# EAGLE board SparkFun_Thing_Plus_RP2350-Panel (EAGLE 9.6.2), part 1 of 8
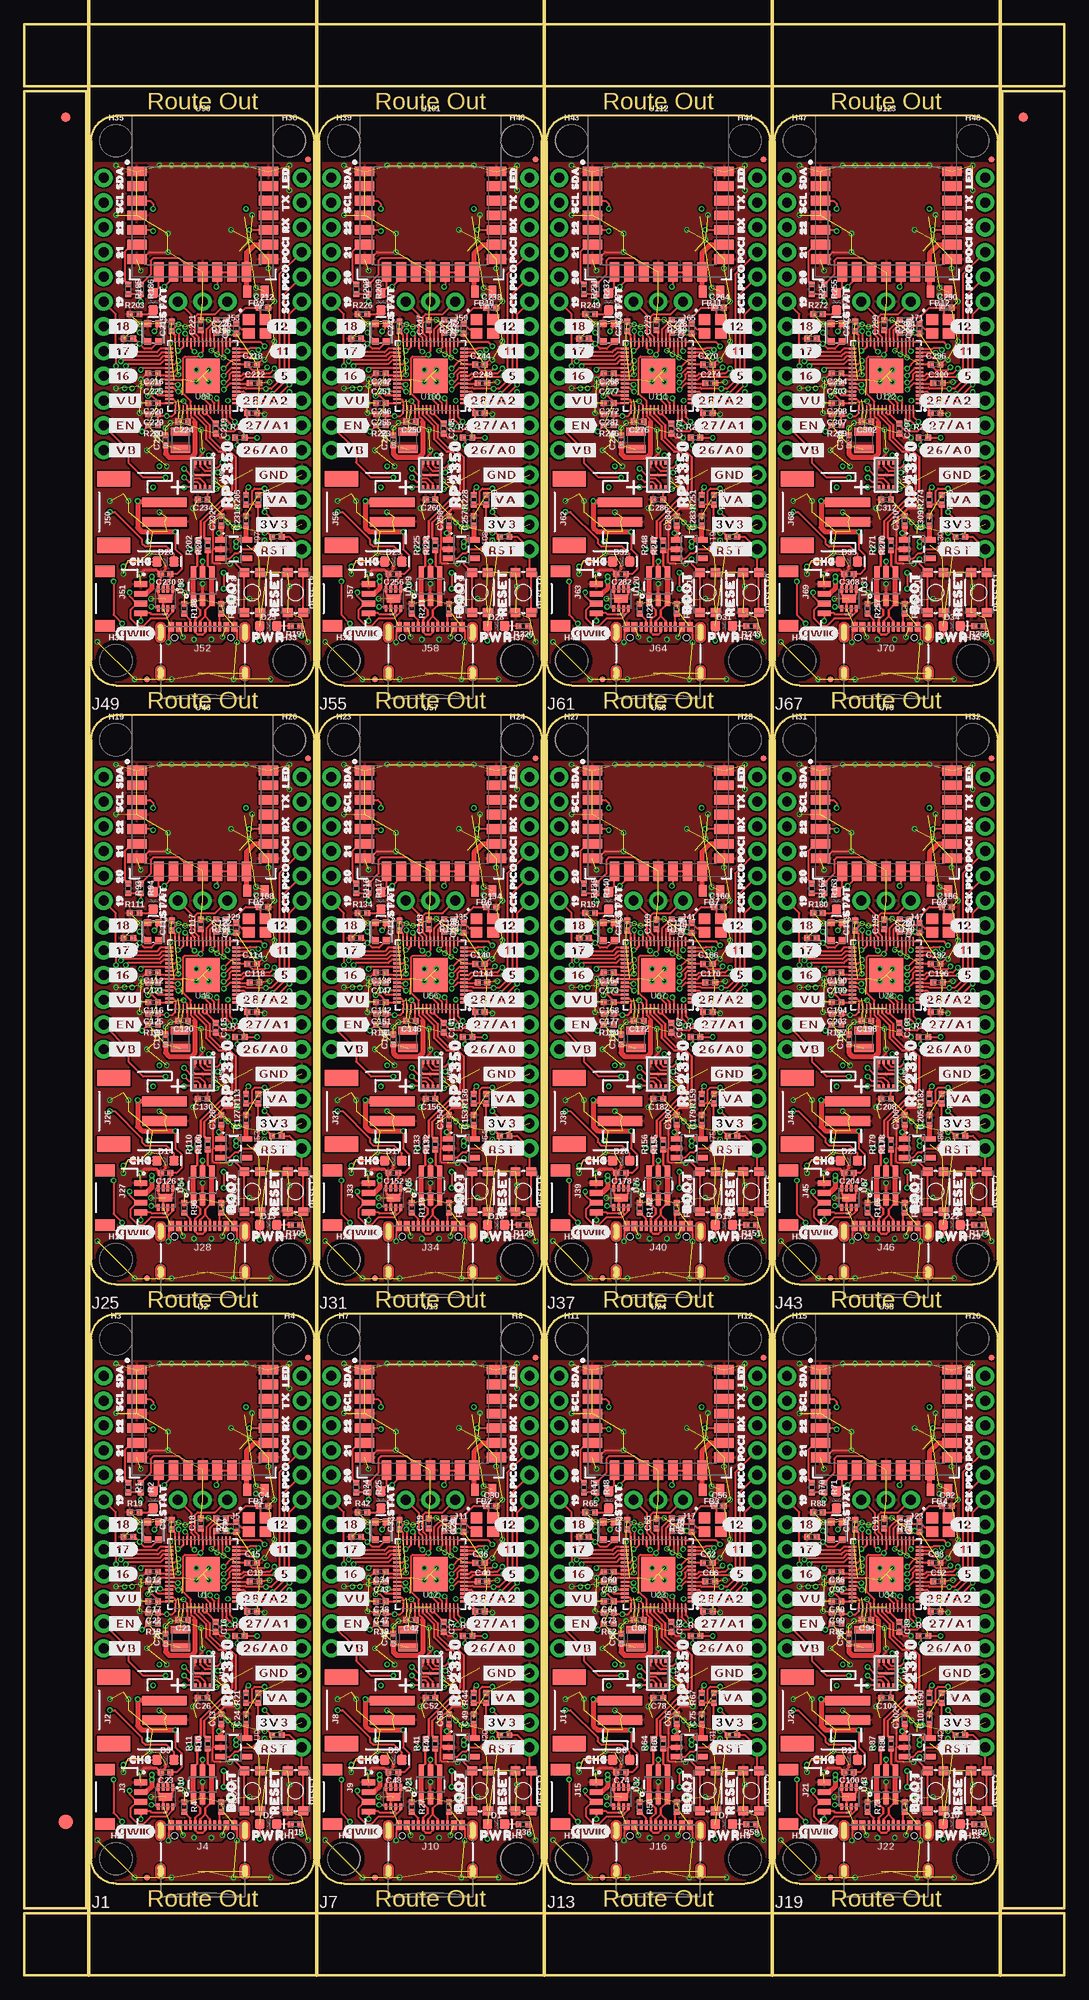
[diagram p0: board, top side]
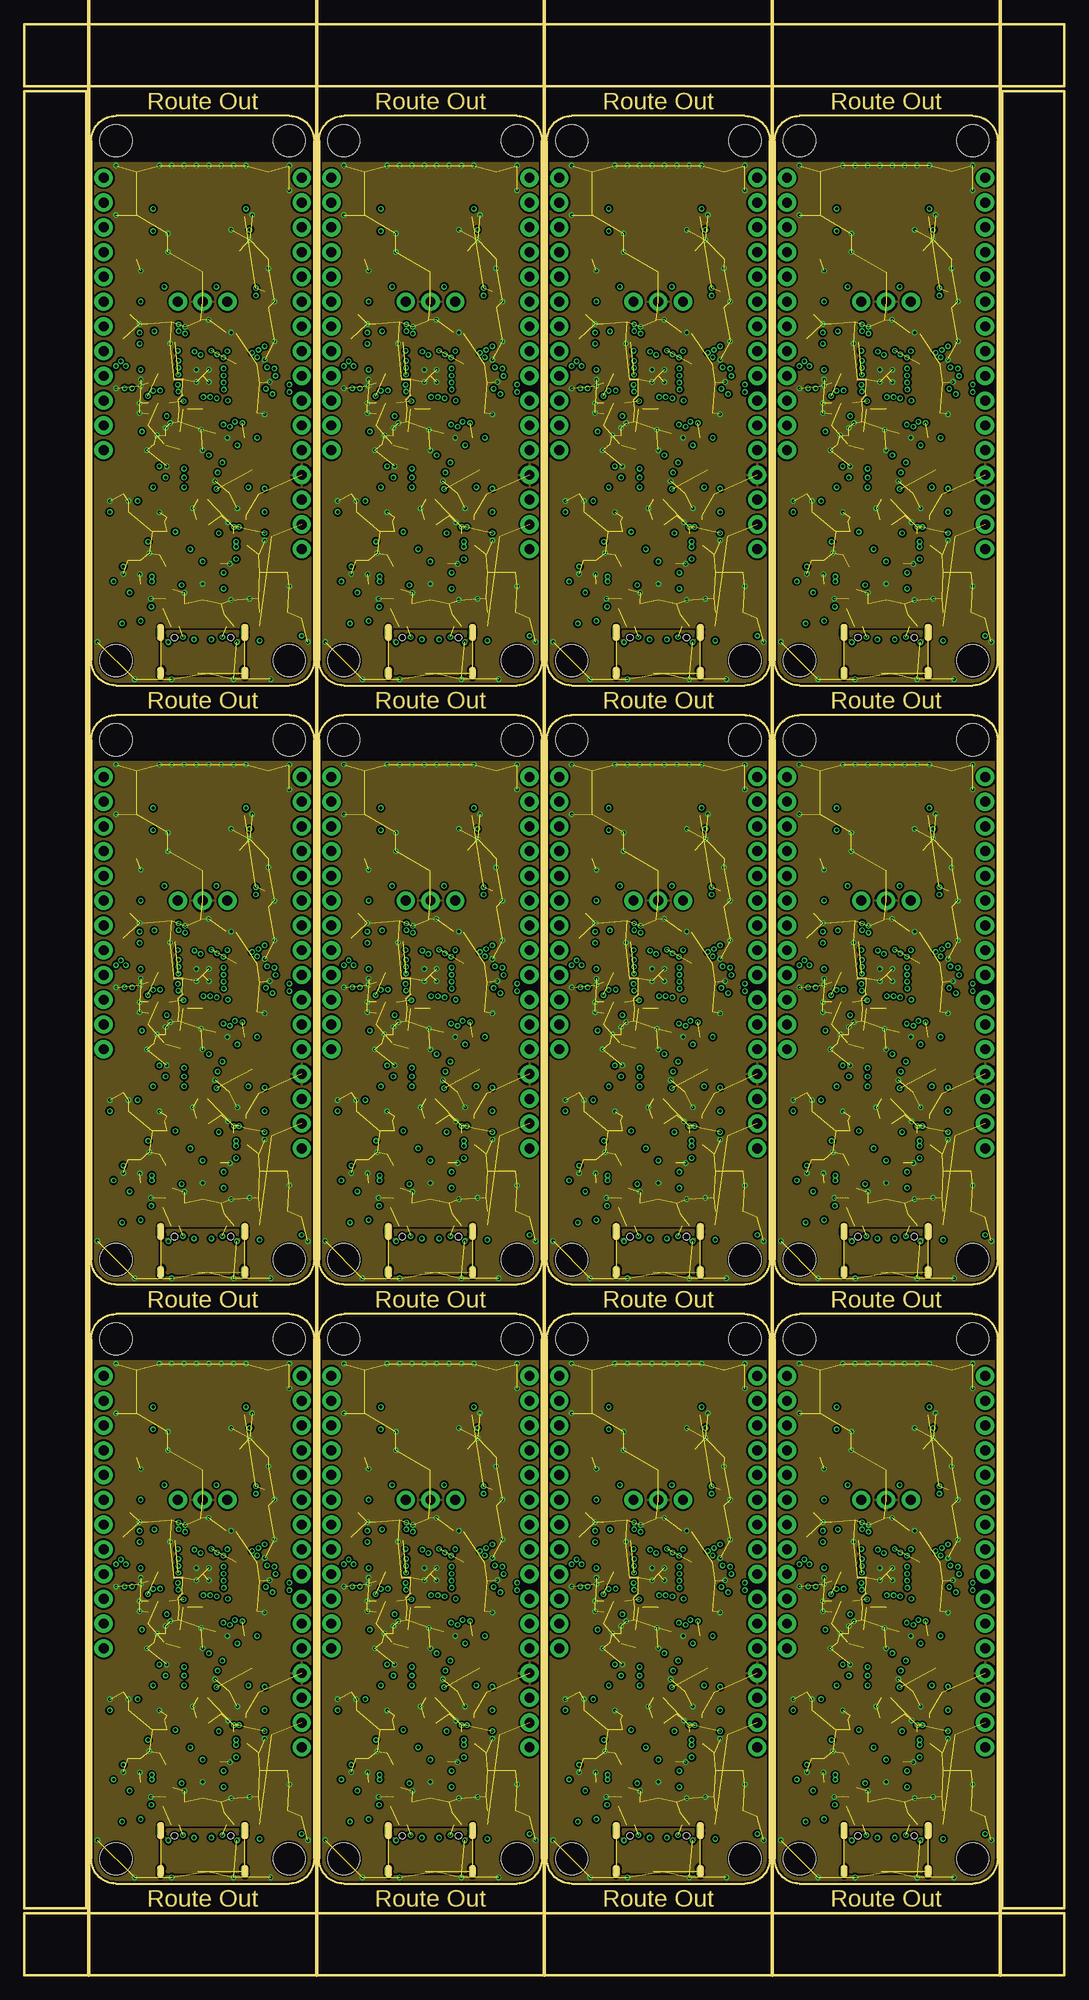
[diagram p1: board, inner layer 2]
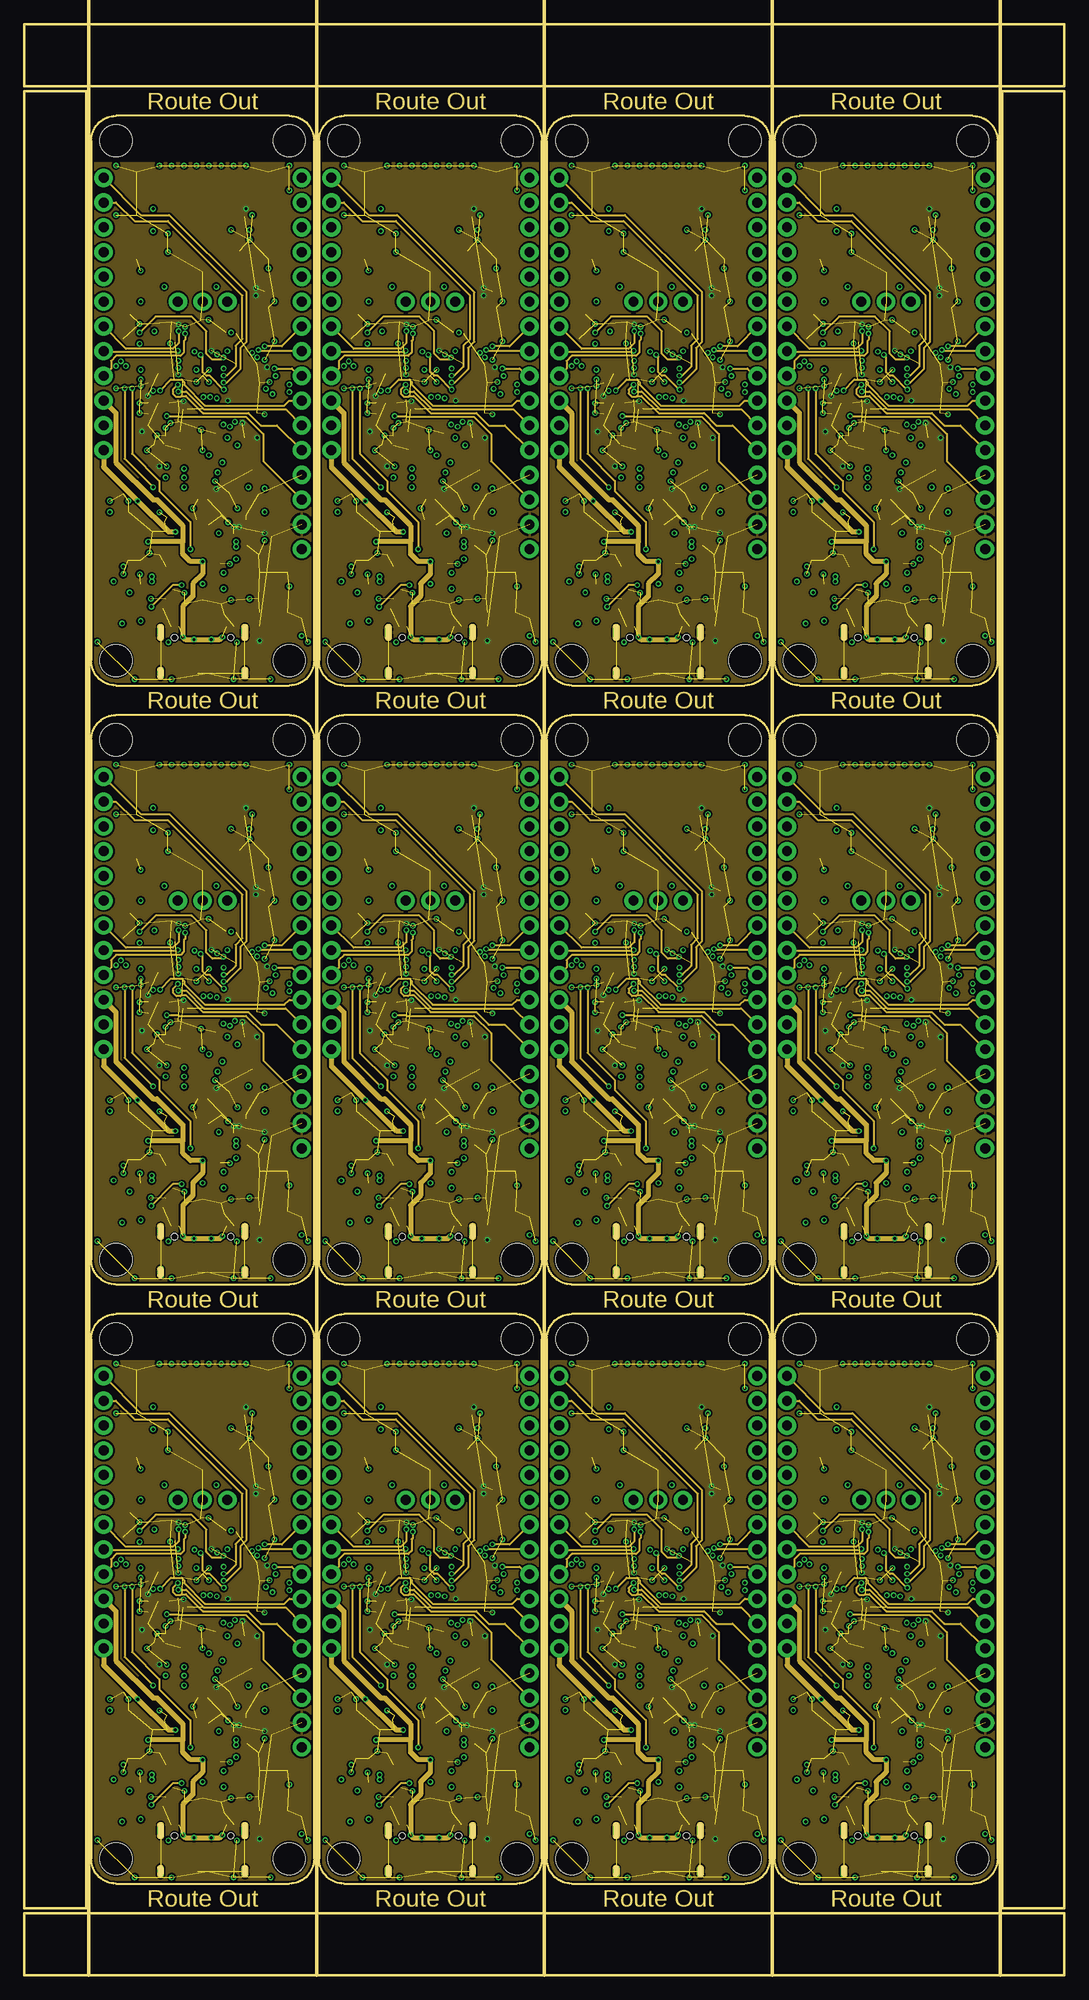
[diagram p2: board, inner layer 15]
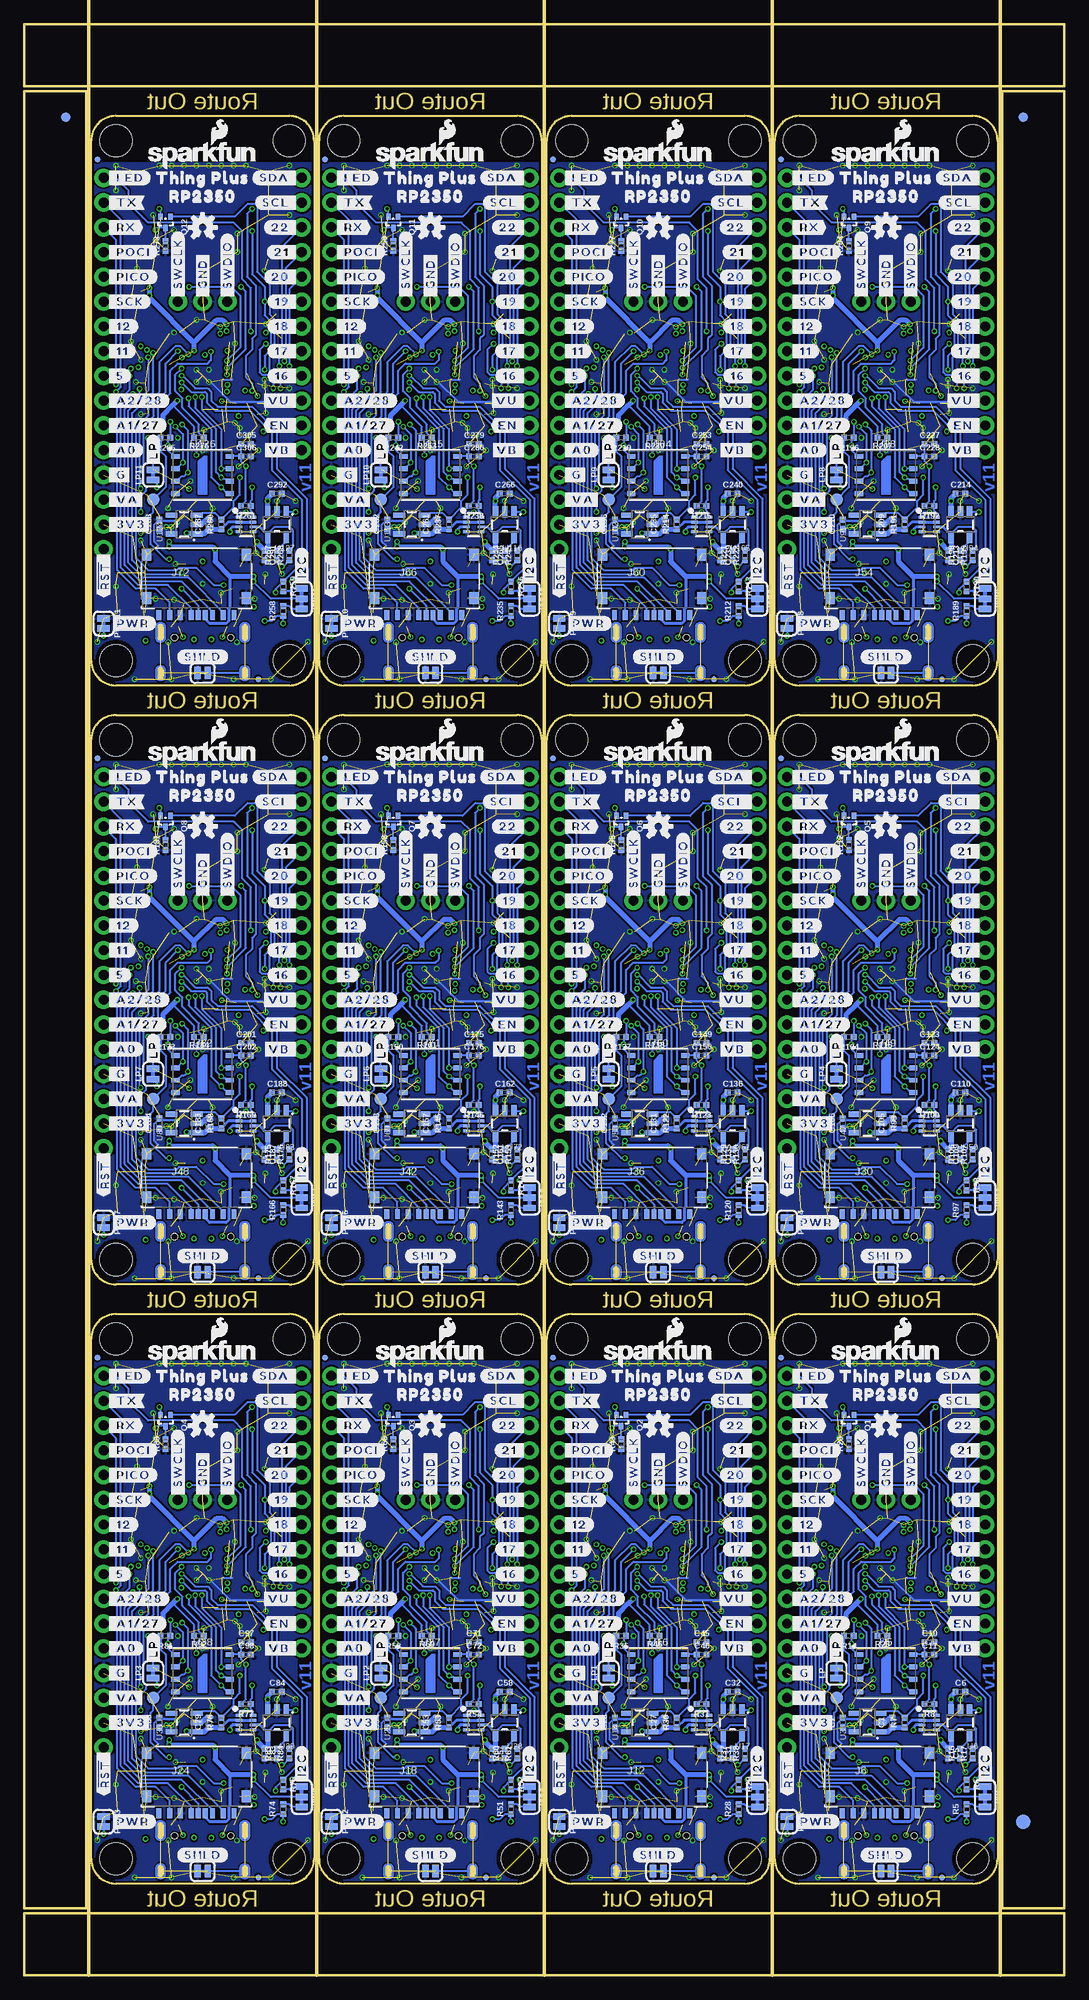
[diagram p3: board, bottom side, seen from below]

Size 106.68 x 200.15 mm. Coordinates in mm from the lower left corner, seen from the top.
Outline: 9.4,9.4 27.18,9.4 arc90 29.72,11.94 29.72,65.28 arc90 27.18,67.82 9.4,67.82 arc90 6.86,65.28 6.86,11.94 arc90 9.4,9.4
Outline: 32.77,9.4 50.55,9.4 arc90 53.09,11.94 53.09,65.28 arc90 50.55,67.82 32.77,67.82 arc90 30.23,65.28 30.23,11.94 arc90 32.77,9.4
Outline: 56.13,9.4 73.91,9.4 arc90 76.45,11.94 76.45,65.28 arc90 73.91,67.82 56.13,67.82 arc90 53.59,65.28 53.59,11.94 arc90 56.13,9.4
Outline: 79.5,9.4 97.28,9.4 arc90 99.82,11.94 99.82,65.28 arc90 97.28,67.82 79.5,67.82 arc90 76.96,65.28 76.96,11.94 arc90 79.5,9.4
Outline: 9.4,70.87 27.18,70.87 arc90 29.72,73.41 29.72,126.75 arc90 27.18,129.29 9.4,129.29 arc90 6.86,126.75 6.86,73.41 arc90 9.4,70.87
Outline: 32.77,70.87 50.55,70.87 arc90 53.09,73.41 53.09,126.75 arc90 50.55,129.29 32.77,129.29 arc90 30.23,126.75 30.23,73.41 arc90 32.77,70.87
Outline: 56.13,70.87 73.91,70.87 arc90 76.45,73.41 76.45,126.75 arc90 73.91,129.29 56.13,129.29 arc90 53.59,126.75 53.59,73.41 arc90 56.13,70.87
Outline: 79.5,70.87 97.28,70.87 arc90 99.82,73.41 99.82,126.75 arc90 97.28,129.29 79.5,129.29 arc90 76.96,126.75 76.96,73.41 arc90 79.5,70.87
Outline: 9.4,132.33 27.18,132.33 arc90 29.72,134.87 29.72,188.21 arc90 27.18,190.75 9.4,190.75 arc90 6.86,188.21 6.86,134.87 arc90 9.4,132.33
Outline: 32.77,132.33 50.55,132.33 arc90 53.09,134.87 53.09,188.21 arc90 50.55,190.75 32.77,190.75 arc90 30.23,188.21 30.23,134.87 arc90 32.77,132.33
Outline: 56.13,132.33 73.91,132.33 arc90 76.45,134.87 76.45,188.21 arc90 73.91,190.75 56.13,190.75 arc90 53.59,188.21 53.59,134.87 arc90 56.13,132.33
Outline: 79.5,132.33 97.28,132.33 arc90 99.82,134.87 99.82,188.21 arc90 97.28,190.75 79.5,190.75 arc90 76.96,188.21 76.96,134.87 arc90 79.5,132.33
Outline: 0,6.35 106.68,6.35 106.68,0 0,0 0,6.35
Outline: 100.33,193.29 106.68,193.29 106.68,6.86 100.33,6.86 100.33,193.29
Outline: 0,200.15 106.68,200.15 106.68,193.8 0,193.8 0,200.15
Outline: 0,193.29 6.35,193.29 6.35,6.86 0,6.86 0,193.29
Copper layers (1*2*15*16): Top 0.035559375mm / dielectric 0.47751875mm / layer 2 0.035559375mm / dielectric 0.47751875mm / layer 15 0.035559375mm / dielectric 0.47751875mm / Bottom 0.035559375mm
Design rules "SparkFun_Thing_Plus_RP2350": minimum track width 5mil, minimum drill 0.2mm, track to track 5mil, track to pad 5mil, pad to pad 5mil, via to via 5mil, smd to smd 5mil, copper to edge 7mil, drill to drill 7mil, minimum pad ring 5mil, minimum via ring 5mil, stop-mask expansion 2.5mil, vias tented up to drill 25mil, thermal gap 10mil
Net classes: 1 USB: width 0.233 mm, clearance 0.127 mm to class 0, clearance 0.127 mm
Milling: 5 lines

## Footprints (pad centres in the part's own frame; a part is rotated, then mirrored left to right if it is on the bottom)
TACTILE_SWITCH_SMD_4.6X2.8MM = smd 0.9 x 1: 1 -2.05,-0.8; 2 2.05,-0.8; 3 2.05,0.8; 4 -2.05,0.8
0402-TIGHT = smd 0.6 x 0.6: 1 -0.5,0; 2 0.5,0
LED-0603 = smd 1 x 1: A -0.877,0; C 0.877,0
FIDUCIAL-1X2 = smd 1 x 1: 1 0,0
FIDUCIAL-1.5X3 = smd 1.5 x 1.5: 1 0,0
0805 = smd 0.8 x 1.2: 1 -0.9,0; 2 0.9,0
FIDUCIAL-MICRO = smd 0.635 x 0.635: 1 0,0
STAND-OFF = hole 3.302: 0,0
SMT-JUMPER_3_2-NC_TRACE_SILK = smd 0.66 x 1.27: 1 -1.041,0; 2 0,0; 3 1.041,0
THING_PLUS = drill 1.016 pad 1.88: 1 1.27,52.07; 2 1.27,49.53; 3 1.27,46.99; 4 1.27,44.45; 5 1.27,41.91; 6 1.27,39.37; 7 1.27,36.83; 8 1.27,34.29; 9 1.27,31.75; 10 1.27,29.21; 11 1.27,26.67; 12 1.27,24.13; 13 21.59,52.07; 14 21.59,49.53; 15 21.59,46.99; 16 21.59,44.45; 17 21.59,41.91; 18 21.59,39.37; 19 21.59,36.83; 20 21.59,34.29; 21 21.59,31.75; 22 21.59,29.21; 23 21.59,26.67; 24 21.59,24.13; 25 21.59,21.59; 26 21.59,19.05; 27 21.59,16.51; 28 21.59,13.97
JST-2-SMD = smd 1 x 4.6: 1 -1,-3.7; 2 1,-3.7 | smd 1.6 x 3.4: NC1 -3.4,1.5; NC2 3.4,1.5
JST04_1MM_RA = smd 0.6 x 1.35: 1 -1.5,0; 2 -0.5,0; 3 0.5,0; 4 1.5,0 | smd 1.2 x 2: NC1 2.8,-3.675; NC2 -2.8,-3.675
USB-C-16P_4LAYER-PADS = smd 0.3 x 1: A5 -1.25,-0.34; A6 -0.25,-0.34; A7 0.25,-0.34; A8 1.25,-0.34; B5 1.75,-0.34; B6 0.75,-0.34; B7 -0.75,-0.34; B8 -1.75,-0.34 | smd 0.6 x 1: GND -3.225,-0.34; GND2 3.225,-0.34; VBUS1 -2.45,-0.34; VBUS2 2.45,-0.34 | drill 0.4 pad 0.6 long: SHLD1 -4.318,-0.915; SHLD2 4.318,-0.915; SHLD3 -4.318,-5.095; SHLD4 4.318,-5.095 | hole 0.65: -2.89,-1.445; 2.89,-1.445
1X03_NO_SILK = drill 1.016 pad 1.88: 1 0,0; 2 2.54,0; 3 5.08,0
MICROSD_ATOM = smd 0.5 x 1: 1 3.85,-3.975; 2 2.75,-3.975; 3 1.65,-3.975; 4 0.9,-3.975; 5 -0.55,-3.975; 6 -1.65,-3.975; 7 -2.75,-3.975; 8 -3.85,-3.975; 9 0.2,-3.975 | smd 0.95 x 1.2: SHIELD1 5.1,-2.225; SHIELD2 5.1,2.225; SHIELD3 -5.1,2.225; SHIELD4 -5.1,-2.225
1008(2520) = smd 0.8 x 2: 1 -0.9,0; 2 0.9,0
SMT-JUMPER_2_NC_TRACE_SILK = smd 0.66 x 1.27: 1 -0.521,0; 2 0.521,0
SOT-416FL = smd 0.46 x 0.65: 1 -0.5,-1.1; 2 0.5,-1.1; 3 0,0.05
PAD.03X.05 = smd 1.27 x 1.27: 1 0,0
RP2350A = smd 0.875 x 0.2: 1 -3.437,2.8; 2 -3.437,2.4; 3 -3.437,2; 4 -3.437,1.6; 5 -3.437,1.2; 6 -3.437,0.8; 7 -3.437,0.4; 8 -3.437,0; 9 -3.437,-0.4; 10 -3.437,-0.8; 11 -3.437,-1.2; 12 -3.437,-1.6; 13 -3.437,-2; 14 -3.437,-2.4; 15 -3.437,-2.8; 31 3.437,-2.8; 32 3.437,-2.4; 33 3.437,-2; 34 3.437,-1.6; 35 3.437,-1.2; 36 3.437,-0.8; 37 3.437,-0.4; 38 3.437,0; 39 3.437,0.4; 40 3.437,0.8; 41 3.437,1.2; 42 3.437,1.6; 43 3.437,2; 44 3.437,2.4; 45 3.437,2.8 | smd 0.2 x 0.875: 16 -2.8,-3.437; 17 -2.4,-3.437; 18 -2,-3.437; 19 -1.6,-3.437; 20 -1.2,-3.437; 21 -0.8,-3.437; 22 -0.4,-3.437; 23 0,-3.437; 24 0.4,-3.437; 25 0.8,-3.437; 26 1.2,-3.437; 27 1.6,-3.437; 28 2,-3.437; 29 2.4,-3.437; 30 2.8,-3.437; 46 2.8,3.437; 47 2.4,3.437; 48 2,3.437; 49 1.6,3.437; 50 1.2,3.437; 51 0.8,3.437; 52 0.4,3.437; 53 0,3.437; 54 -0.4,3.437; 55 -0.8,3.437; 56 -1.2,3.437; 57 -1.6,3.437; 58 -2,3.437; 59 -2.4,3.437; 60 -2.8,3.437 | smd 3.5 x 3.5: EPAD 0,0
RM2 = smd 2 x 1: A1 -6.75,2.55; A2 -6.75,1.05; A3 -6.75,-0.45; A4 -6.75,-1.95; A5 -6.75,-3.45; A6 -6.75,-4.95; A7 -6.75,-6.45; C1 6.75,-6.45; C2 6.75,-4.95; C3 6.75,-3.45; C4 6.75,-1.95; C5 6.75,-0.45; C6 6.75,1.05; C7 6.75,2.55 | smd 1 x 2: B1 -4.5,-7.75; B2 -3,-7.75; B3 -1.5,-7.75; B4 0,-7.75; B5 1.5,-7.75; B6 3,-7.75; B7 4.5,-7.75
SOT23-5 = smd 0.55 x 1.2: 1 -0.95,-1.3; 2 0,-1.3; 3 0.95,-1.3; 4 0.95,1.3; 5 -0.95,1.3
SOT8 = smd 0.67 x 0.3: 1 -0.74,0.75; 2 -0.74,0.25; 3 -0.74,-0.25; 4 -0.74,-0.75; 5 0.74,-0.75; 6 0.74,-0.25; 7 0.74,0.25; 8 0.74,0.75
WSON-8-6X5-SKINNY_CENTERPAD = smd 0.85 x 0.5: 1 -2.775,1.905; 2 -2.775,0.635; 3 -2.775,-0.635; 4 -2.775,-1.905; 5 2.775,-1.905; 6 2.775,-0.635; 7 2.775,0.635; 8 2.775,1.905
WS2812-2020 = smd 0.7 x 0.7: DI -0.915,0.55; DO 0.915,-0.55; GND 0.915,0.55; VCC -0.915,-0.55
DFN-8 = smd 0.3 x 0.7: 1 -0.75,-0.99; 2 -0.25,-0.99; 3 0.25,-0.99; 4 0.75,-0.99; 5 0.75,0.99; 6 0.25,0.99; 7 -0.25,0.99; 8 -0.75,0.99 | smd 1.38 x 0.8: 9 0,0
SOT-23-6 = smd 0.55 x 1.35: 1 -0.95,-1.375; 2 0,-1.375; 3 0.95,-1.375; 4 0.95,1.375; 5 0,1.375; 6 -0.95,1.375
APS6404L-3SQR-ZR = smd 0.4 x 0.25: 1 -1.25,0.75; 2 -1.25,0.25; 3 -1.25,-0.25; 4 -1.25,-0.75; 5 1.25,-0.75; 6 1.25,-0.25; 7 1.25,0.25; 8 1.25,0.75 | smd 0.2 x 1.6: 9 0,0
CRYSTAL-SMD-2X2.5MM = smd 1.2 x 1.1: P1 0.846,0.69; P2 -0.854,0.69; P3 -0.854,-0.71; P4 0.846,-0.71

## Placement (x,y rotation side)
BOOT  MOMENTARY-SWITCH-SPST-SMD-4.6X2.8MM  [TACTILE_SWITCH_SMD_4.6X2.8MM]  23.37,18.92 90 top
BOOT1  MOMENTARY-SWITCH-SPST-SMD-4.6X2.8MM  [TACTILE_SWITCH_SMD_4.6X2.8MM]  46.74,18.92 90 top
BOOT2  MOMENTARY-SWITCH-SPST-SMD-4.6X2.8MM  [TACTILE_SWITCH_SMD_4.6X2.8MM]  70.1,18.92 90 top
BOOT3  MOMENTARY-SWITCH-SPST-SMD-4.6X2.8MM  [TACTILE_SWITCH_SMD_4.6X2.8MM]  93.47,18.92 90 top
BOOT4  MOMENTARY-SWITCH-SPST-SMD-4.6X2.8MM  [TACTILE_SWITCH_SMD_4.6X2.8MM]  23.37,80.39 90 top
BOOT5  MOMENTARY-SWITCH-SPST-SMD-4.6X2.8MM  [TACTILE_SWITCH_SMD_4.6X2.8MM]  46.74,80.39 90 top
BOOT6  MOMENTARY-SWITCH-SPST-SMD-4.6X2.8MM  [TACTILE_SWITCH_SMD_4.6X2.8MM]  70.1,80.39 90 top
BOOT7  MOMENTARY-SWITCH-SPST-SMD-4.6X2.8MM  [TACTILE_SWITCH_SMD_4.6X2.8MM]  93.47,80.39 90 top
BOOT8  MOMENTARY-SWITCH-SPST-SMD-4.6X2.8MM  [TACTILE_SWITCH_SMD_4.6X2.8MM]  23.37,141.86 90 top
BOOT9  MOMENTARY-SWITCH-SPST-SMD-4.6X2.8MM  [TACTILE_SWITCH_SMD_4.6X2.8MM]  46.74,141.86 90 top
BOOT10  MOMENTARY-SWITCH-SPST-SMD-4.6X2.8MM  [TACTILE_SWITCH_SMD_4.6X2.8MM]  70.1,141.86 90 top
BOOT11  MOMENTARY-SWITCH-SPST-SMD-4.6X2.8MM  [TACTILE_SWITCH_SMD_4.6X2.8MM]  93.47,141.86 90 top
C1  2.2uF  [0402-TIGHT]  17.65,25.92 90 bottom
C2  2.2uF  [0402-TIGHT]  22.73,25.92 90 bottom
C3  15pF  [0402-TIGHT]  21.72,45.98 90 top
C4  15pF  [0402-TIGHT]  24.52,48.13 0 top
C5  2.2uF  [0402-TIGHT]  11.94,22.73 270 bottom
C6  2.2uF  [0402-TIGHT]  10.67,29.08 0 bottom
C7  0.1uF  [0402-TIGHT]  13.21,40.39 180 top
C8  0.1uF  [0402-TIGHT]  20.19,45.59 0 top
C9  0.1uF  [0402-TIGHT]  15.11,46.23 90 top
C10  2.2uF  [0402-TIGHT]  13.84,34.16 0 bottom
C11  0.1uF  [0402-TIGHT]  13.84,32.89 0 bottom
C12  0.1uF  [0402-TIGHT]  13.21,41.4 180 top
C13  2.2uF  [0402-TIGHT]  20.19,26.29 90 top
C14  0.1uF  [0402-TIGHT]  23.37,37.34 0 top
C15  0.1uF  [0402-TIGHT]  23.37,42.29 0 top
C16  0.1uF  [0402-TIGHT]  19.63,35.74 270 top
C17  0.1uF  [0402-TIGHT]  13.21,38.35 180 top
C18  0.1uF  [0402-TIGHT]  18.1,46.36 90 top
C19  0.1uF  [0402-TIGHT]  23.62,40.39 0 top
C20  10uF  [0402-TIGHT]  14.48,34.54 90 top
C21  10uF  [0402-TIGHT]  16.28,36.45 180 top
C22  2.2uF  [0402-TIGHT]  13.21,37.21 180 top
C23  0.1uF  [0402-TIGHT]  14.48,20.83 180 top
C24  10uF  [0402-TIGHT]  22.73,26.29 90 top
C25  0.1uF  [0402-TIGHT]  10.67,44.96 180 top
C26  0.1uF  [0402-TIGHT]  18.29,28.45 180 top
C27  2.2uF  [0402-TIGHT]  41.02,25.92 90 bottom
C28  2.2uF  [0402-TIGHT]  46.1,25.92 90 bottom
C29  15pF  [0402-TIGHT]  45.08,45.98 90 top
C30  15pF  [0402-TIGHT]  47.89,48.13 0 top
C31  2.2uF  [0402-TIGHT]  35.31,22.73 270 bottom
C32  2.2uF  [0402-TIGHT]  34.04,29.08 0 bottom
C33  0.1uF  [0402-TIGHT]  38.48,46.23 90 top
C34  0.1uF  [0402-TIGHT]  36.58,41.4 180 top
C35  0.1uF  [0402-TIGHT]  46.74,37.34 0 top
C36  0.1uF  [0402-TIGHT]  46.74,42.29 0 top
C37  0.1uF  [0402-TIGHT]  43,35.74 270 top
C38  0.1uF  [0402-TIGHT]  36.58,38.35 180 top
C39  0.1uF  [0402-TIGHT]  41.47,46.36 90 top
C40  0.1uF  [0402-TIGHT]  46.99,40.39 0 top
C41  10uF  [0402-TIGHT]  37.85,34.54 90 top
C42  10uF  [0402-TIGHT]  39.65,36.45 180 top
C43  0.1uF  [0402-TIGHT]  36.58,40.39 180 top
C44  0.1uF  [0402-TIGHT]  43.56,45.59 0 top
C45  2.2uF  [0402-TIGHT]  37.21,34.16 0 bottom
C46  0.1uF  [0402-TIGHT]  37.21,32.89 0 bottom
C47  2.2uF  [0402-TIGHT]  36.58,37.21 180 top
C48  0.1uF  [0402-TIGHT]  37.85,20.83 180 top
C49  10uF  [0402-TIGHT]  46.1,26.29 90 top
C50  2.2uF  [0402-TIGHT]  43.56,26.29 90 top
C51  0.1uF  [0402-TIGHT]  34.04,44.96 180 top
C52  0.1uF  [0402-TIGHT]  41.66,28.45 180 top
C53  2.2uF  [0402-TIGHT]  64.39,25.92 90 bottom
C54  2.2uF  [0402-TIGHT]  69.47,25.92 90 bottom
C55  15pF  [0402-TIGHT]  68.45,45.98 90 top
C56  15pF  [0402-TIGHT]  71.26,48.13 0 top
C57  2.2uF  [0402-TIGHT]  58.67,22.73 270 bottom
C58  2.2uF  [0402-TIGHT]  57.4,29.08 0 bottom
C59  0.1uF  [0402-TIGHT]  61.85,46.23 90 top
C60  0.1uF  [0402-TIGHT]  59.94,41.4 180 top
C61  0.1uF  [0402-TIGHT]  70.1,37.34 0 top
C62  0.1uF  [0402-TIGHT]  70.1,42.29 0 top
C63  0.1uF  [0402-TIGHT]  66.37,35.74 270 top
C64  0.1uF  [0402-TIGHT]  59.94,38.35 180 top
C65  0.1uF  [0402-TIGHT]  64.83,46.36 90 top
C66  0.1uF  [0402-TIGHT]  70.36,40.39 0 top
C67  10uF  [0402-TIGHT]  61.21,34.54 90 top
C68  10uF  [0402-TIGHT]  63.02,36.45 180 top
C69  0.1uF  [0402-TIGHT]  59.94,40.39 180 top
C70  0.1uF  [0402-TIGHT]  66.93,45.59 0 top
C71  2.2uF  [0402-TIGHT]  60.58,34.16 0 bottom
C72  0.1uF  [0402-TIGHT]  60.58,32.89 0 bottom
C73  2.2uF  [0402-TIGHT]  59.94,37.21 180 top
C74  0.1uF  [0402-TIGHT]  61.21,20.83 180 top
C75  10uF  [0402-TIGHT]  69.47,26.29 90 top
C76  2.2uF  [0402-TIGHT]  66.93,26.29 90 top
C77  0.1uF  [0402-TIGHT]  57.4,44.96 180 top
C78  0.1uF  [0402-TIGHT]  65.02,28.45 180 top
C79  2.2uF  [0402-TIGHT]  87.76,25.92 90 bottom
C80  2.2uF  [0402-TIGHT]  92.84,25.92 90 bottom
C81  15pF  [0402-TIGHT]  91.82,45.98 90 top
C82  15pF  [0402-TIGHT]  94.62,48.13 0 top
C83  2.2uF  [0402-TIGHT]  82.04,22.73 270 bottom
C84  2.2uF  [0402-TIGHT]  80.77,29.08 0 bottom
C85  0.1uF  [0402-TIGHT]  85.22,46.23 90 top
C86  0.1uF  [0402-TIGHT]  83.31,41.4 180 top
C87  0.1uF  [0402-TIGHT]  93.47,37.34 0 top
C88  0.1uF  [0402-TIGHT]  93.47,42.29 0 top
C89  0.1uF  [0402-TIGHT]  89.74,35.74 270 top
C90  0.1uF  [0402-TIGHT]  83.31,38.35 180 top
C91  0.1uF  [0402-TIGHT]  88.2,46.36 90 top
C92  0.1uF  [0402-TIGHT]  93.73,40.39 0 top
C93  10uF  [0402-TIGHT]  84.58,34.54 90 top
C94  10uF  [0402-TIGHT]  86.39,36.45 180 top
C95  0.1uF  [0402-TIGHT]  83.31,40.39 180 top
C96  0.1uF  [0402-TIGHT]  90.3,45.59 0 top
C97  2.2uF  [0402-TIGHT]  83.95,34.16 0 bottom
C98  0.1uF  [0402-TIGHT]  83.95,32.89 0 bottom
C99  2.2uF  [0402-TIGHT]  83.31,37.21 180 top
C100  0.1uF  [0402-TIGHT]  84.58,20.83 180 top
C101  10uF  [0402-TIGHT]  92.84,26.29 90 top
C102  2.2uF  [0402-TIGHT]  90.3,26.29 90 top
C103  0.1uF  [0402-TIGHT]  80.77,44.96 180 top
C104  0.1uF  [0402-TIGHT]  88.39,28.45 180 top
C105  2.2uF  [0402-TIGHT]  17.65,87.38 90 bottom
C106  2.2uF  [0402-TIGHT]  22.73,87.38 90 bottom
C107  15pF  [0402-TIGHT]  21.72,107.45 90 top
C108  15pF  [0402-TIGHT]  24.52,109.6 0 top
C109  2.2uF  [0402-TIGHT]  11.94,84.2 270 bottom
C110  2.2uF  [0402-TIGHT]  10.67,90.55 0 bottom
C111  0.1uF  [0402-TIGHT]  15.11,107.7 90 top
C112  0.1uF  [0402-TIGHT]  13.21,102.87 180 top
C113  0.1uF  [0402-TIGHT]  23.37,98.81 0 top
C114  0.1uF  [0402-TIGHT]  23.37,103.76 0 top
C115  0.1uF  [0402-TIGHT]  19.63,97.21 270 top
C116  0.1uF  [0402-TIGHT]  13.21,99.82 180 top
C117  0.1uF  [0402-TIGHT]  18.1,107.82 90 top
C118  0.1uF  [0402-TIGHT]  23.62,101.85 0 top
C119  10uF  [0402-TIGHT]  14.48,96.01 90 top
C120  10uF  [0402-TIGHT]  16.28,97.92 180 top
C121  0.1uF  [0402-TIGHT]  13.21,101.85 180 top
C122  0.1uF  [0402-TIGHT]  20.19,107.06 0 top
C123  2.2uF  [0402-TIGHT]  13.84,95.63 0 bottom
C124  0.1uF  [0402-TIGHT]  13.84,94.36 0 bottom
C125  2.2uF  [0402-TIGHT]  13.21,98.68 180 top
C126  0.1uF  [0402-TIGHT]  14.48,82.3 180 top
C127  10uF  [0402-TIGHT]  22.73,87.76 90 top
C128  2.2uF  [0402-TIGHT]  20.19,87.76 90 top
C129  0.1uF  [0402-TIGHT]  10.67,106.43 180 top
C130  0.1uF  [0402-TIGHT]  18.29,89.92 180 top
C131  2.2uF  [0402-TIGHT]  41.02,87.38 90 bottom
C132  2.2uF  [0402-TIGHT]  46.1,87.38 90 bottom
C133  15pF  [0402-TIGHT]  45.08,107.45 90 top
C134  15pF  [0402-TIGHT]  47.89,109.6 0 top
C135  2.2uF  [0402-TIGHT]  35.31,84.2 270 bottom
C136  2.2uF  [0402-TIGHT]  34.04,90.55 0 bottom
C137  0.1uF  [0402-TIGHT]  38.48,107.7 90 top
C138  0.1uF  [0402-TIGHT]  36.58,102.87 180 top
C139  0.1uF  [0402-TIGHT]  46.74,98.81 0 top
C140  0.1uF  [0402-TIGHT]  46.74,103.76 0 top
C141  0.1uF  [0402-TIGHT]  43,97.21 270 top
C142  0.1uF  [0402-TIGHT]  36.58,99.82 180 top
C143  0.1uF  [0402-TIGHT]  41.47,107.82 90 top
C144  0.1uF  [0402-TIGHT]  46.99,101.85 0 top
C145  10uF  [0402-TIGHT]  37.85,96.01 90 top
C146  10uF  [0402-TIGHT]  39.65,97.92 180 top
C147  0.1uF  [0402-TIGHT]  36.58,101.85 180 top
C148  0.1uF  [0402-TIGHT]  43.56,107.06 0 top
C149  2.2uF  [0402-TIGHT]  37.21,95.63 0 bottom
C150  0.1uF  [0402-TIGHT]  37.21,94.36 0 bottom
C151  2.2uF  [0402-TIGHT]  36.58,98.68 180 top
C152  0.1uF  [0402-TIGHT]  37.85,82.3 180 top
C153  10uF  [0402-TIGHT]  46.1,87.76 90 top
C154  2.2uF  [0402-TIGHT]  43.56,87.76 90 top
C155  0.1uF  [0402-TIGHT]  34.04,106.43 180 top
C156  0.1uF  [0402-TIGHT]  41.66,89.92 180 top
C157  2.2uF  [0402-TIGHT]  64.39,87.38 90 bottom
C158  2.2uF  [0402-TIGHT]  69.47,87.38 90 bottom
C159  15pF  [0402-TIGHT]  68.45,107.45 90 top
C160  15pF  [0402-TIGHT]  71.26,109.6 0 top
C161  2.2uF  [0402-TIGHT]  58.67,84.2 270 bottom
C162  2.2uF  [0402-TIGHT]  57.4,90.55 0 bottom
C163  0.1uF  [0402-TIGHT]  61.85,107.7 90 top
C164  0.1uF  [0402-TIGHT]  59.94,102.87 180 top
C165  0.1uF  [0402-TIGHT]  70.1,98.81 0 top
C166  0.1uF  [0402-TIGHT]  70.1,103.76 0 top
C167  0.1uF  [0402-TIGHT]  66.37,97.21 270 top
C168  0.1uF  [0402-TIGHT]  59.94,99.82 180 top
C169  0.1uF  [0402-TIGHT]  64.83,107.82 90 top
C170  0.1uF  [0402-TIGHT]  70.36,101.85 0 top
C171  10uF  [0402-TIGHT]  61.21,96.01 90 top
C172  10uF  [0402-TIGHT]  63.02,97.92 180 top
C173  0.1uF  [0402-TIGHT]  59.94,101.85 180 top
C174  0.1uF  [0402-TIGHT]  66.93,107.06 0 top
C175  2.2uF  [0402-TIGHT]  60.58,95.63 0 bottom
C176  0.1uF  [0402-TIGHT]  60.58,94.36 0 bottom
C177  2.2uF  [0402-TIGHT]  59.94,98.68 180 top
C178  0.1uF  [0402-TIGHT]  61.21,82.3 180 top
C179  10uF  [0402-TIGHT]  69.47,87.76 90 top
C180  2.2uF  [0402-TIGHT]  66.93,87.76 90 top
C181  0.1uF  [0402-TIGHT]  57.4,106.43 180 top
C182  0.1uF  [0402-TIGHT]  65.02,89.92 180 top
C183  2.2uF  [0402-TIGHT]  87.76,87.38 90 bottom
C184  2.2uF  [0402-TIGHT]  92.84,87.38 90 bottom
C185  15pF  [0402-TIGHT]  91.82,107.45 90 top
C186  15pF  [0402-TIGHT]  94.62,109.6 0 top
C187  2.2uF  [0402-TIGHT]  82.04,84.2 270 bottom
C188  2.2uF  [0402-TIGHT]  80.77,90.55 0 bottom
C189  0.1uF  [0402-TIGHT]  85.22,107.7 90 top
C190  0.1uF  [0402-TIGHT]  83.31,102.87 180 top
C191  0.1uF  [0402-TIGHT]  93.47,98.81 0 top
C192  0.1uF  [0402-TIGHT]  93.47,103.76 0 top
C193  0.1uF  [0402-TIGHT]  89.74,97.21 270 top
C194  0.1uF  [0402-TIGHT]  83.31,99.82 180 top
C195  0.1uF  [0402-TIGHT]  88.2,107.82 90 top
C196  0.1uF  [0402-TIGHT]  93.73,101.85 0 top
C197  10uF  [0402-TIGHT]  84.58,96.01 90 top
C198  10uF  [0402-TIGHT]  86.39,97.92 180 top
C199  0.1uF  [0402-TIGHT]  83.31,101.85 180 top
C200  0.1uF  [0402-TIGHT]  90.3,107.06 0 top
C201  2.2uF  [0402-TIGHT]  83.95,95.63 0 bottom
C202  0.1uF  [0402-TIGHT]  83.95,94.36 0 bottom
C203  2.2uF  [0402-TIGHT]  83.31,98.68 180 top
C204  0.1uF  [0402-TIGHT]  84.58,82.3 180 top
C205  10uF  [0402-TIGHT]  92.84,87.76 90 top
C206  2.2uF  [0402-TIGHT]  90.3,87.76 90 top
C207  0.1uF  [0402-TIGHT]  80.77,106.43 180 top
C208  0.1uF  [0402-TIGHT]  88.39,89.92 180 top
C209  2.2uF  [0402-TIGHT]  17.65,148.85 90 bottom
C210  2.2uF  [0402-TIGHT]  22.73,148.85 90 bottom
C211  15pF  [0402-TIGHT]  21.72,168.92 90 top
C212  15pF  [0402-TIGHT]  24.52,171.07 0 top
C213  2.2uF  [0402-TIGHT]  11.94,145.67 270 bottom
C214  2.2uF  [0402-TIGHT]  10.67,152.02 0 bottom
C215  0.1uF  [0402-TIGHT]  15.11,169.16 90 top
C216  0.1uF  [0402-TIGHT]  13.21,164.34 180 top
C217  0.1uF  [0402-TIGHT]  23.37,160.27 0 top
C218  0.1uF  [0402-TIGHT]  23.37,165.23 0 top
C219  0.1uF  [0402-TIGHT]  19.63,158.67 270 top
C220  0.1uF  [0402-TIGHT]  13.21,161.29 180 top
C221  0.1uF  [0402-TIGHT]  18.1,169.29 90 top
C222  0.1uF  [0402-TIGHT]  23.62,163.32 0 top
C223  10uF  [0402-TIGHT]  14.48,157.48 90 top
C224  10uF  [0402-TIGHT]  16.28,159.38 180 top
C225  0.1uF  [0402-TIGHT]  13.21,163.32 180 top
C226  0.1uF  [0402-TIGHT]  20.19,168.53 0 top
C227  2.2uF  [0402-TIGHT]  13.84,157.1 0 bottom
C228  0.1uF  [0402-TIGHT]  13.84,155.83 0 bottom
C229  2.2uF  [0402-TIGHT]  13.21,160.15 180 top
C230  0.1uF  [0402-TIGHT]  14.48,143.76 180 top
C231  10uF  [0402-TIGHT]  22.73,149.22 90 top
C232  2.2uF  [0402-TIGHT]  20.19,149.22 90 top
C233  0.1uF  [0402-TIGHT]  10.67,167.89 180 top
C234  0.1uF  [0402-TIGHT]  18.29,151.38 180 top
C235  2.2uF  [0402-TIGHT]  41.02,148.85 90 bottom
C236  2.2uF  [0402-TIGHT]  46.1,148.85 90 bottom
C237  15pF  [0402-TIGHT]  45.08,168.92 90 top
C238  15pF  [0402-TIGHT]  47.89,171.07 0 top
C239  2.2uF  [0402-TIGHT]  35.31,145.67 270 bottom
C240  2.2uF  [0402-TIGHT]  34.04,152.02 0 bottom
C241  0.1uF  [0402-TIGHT]  38.48,169.16 90 top
C242  0.1uF  [0402-TIGHT]  36.58,164.34 180 top
C243  0.1uF  [0402-TIGHT]  46.74,160.27 0 top
C244  0.1uF  [0402-TIGHT]  46.74,165.23 0 top
C245  0.1uF  [0402-TIGHT]  43,158.67 270 top
C246  0.1uF  [0402-TIGHT]  36.58,161.29 180 top
C247  0.1uF  [0402-TIGHT]  41.47,169.29 90 top
C248  0.1uF  [0402-TIGHT]  46.99,163.32 0 top
C249  10uF  [0402-TIGHT]  37.85,157.48 90 top
C250  10uF  [0402-TIGHT]  39.65,159.38 180 top
C251  0.1uF  [0402-TIGHT]  36.58,163.32 180 top
C252  0.1uF  [0402-TIGHT]  43.56,168.53 0 top
C253  2.2uF  [0402-TIGHT]  37.21,157.1 0 bottom
C254  0.1uF  [0402-TIGHT]  37.21,155.83 0 bottom
C255  2.2uF  [0402-TIGHT]  36.58,160.15 180 top
C256  0.1uF  [0402-TIGHT]  37.85,143.76 180 top
C257  10uF  [0402-TIGHT]  46.1,149.22 90 top
C258  2.2uF  [0402-TIGHT]  43.56,149.22 90 top
C259  0.1uF  [0402-TIGHT]  34.04,167.89 180 top
C260  0.1uF  [0402-TIGHT]  41.66,151.38 180 top
C261  2.2uF  [0402-TIGHT]  64.39,148.85 90 bottom
C262  2.2uF  [0402-TIGHT]  69.47,148.85 90 bottom
C263  15pF  [0402-TIGHT]  68.45,168.92 90 top
C264  15pF  [0402-TIGHT]  71.26,171.07 0 top
C265  2.2uF  [0402-TIGHT]  58.67,145.67 270 bottom
C266  2.2uF  [0402-TIGHT]  57.4,152.02 0 bottom
C267  0.1uF  [0402-TIGHT]  61.85,169.16 90 top
C268  0.1uF  [0402-TIGHT]  59.94,164.34 180 top
C269  0.1uF  [0402-TIGHT]  70.1,160.27 0 top
C270  0.1uF  [0402-TIGHT]  70.1,165.23 0 top
C271  0.1uF  [0402-TIGHT]  66.37,158.67 270 top
C272  0.1uF  [0402-TIGHT]  59.94,161.29 180 top
C273  0.1uF  [0402-TIGHT]  64.83,169.29 90 top
C274  0.1uF  [0402-TIGHT]  70.36,163.32 0 top
C275  10uF  [0402-TIGHT]  61.21,157.48 90 top
C276  10uF  [0402-TIGHT]  63.02,159.38 180 top
C277  0.1uF  [0402-TIGHT]  59.94,163.32 180 top
C278  0.1uF  [0402-TIGHT]  66.93,168.53 0 top
C279  2.2uF  [0402-TIGHT]  60.58,157.1 0 bottom
C280  0.1uF  [0402-TIGHT]  60.58,155.83 0 bottom
C281  2.2uF  [0402-TIGHT]  59.94,160.15 180 top
C282  0.1uF  [0402-TIGHT]  61.21,143.76 180 top
C283  10uF  [0402-TIGHT]  69.47,149.22 90 top
C284  2.2uF  [0402-TIGHT]  66.93,149.22 90 top
C285  0.1uF  [0402-TIGHT]  57.4,167.89 180 top
C286  0.1uF  [0402-TIGHT]  65.02,151.38 180 top
C287  2.2uF  [0402-TIGHT]  87.76,148.85 90 bottom
C288  2.2uF  [0402-TIGHT]  92.84,148.85 90 bottom
C289  15pF  [0402-TIGHT]  91.82,168.92 90 top
C290  15pF  [0402-TIGHT]  94.62,171.07 0 top
C291  2.2uF  [0402-TIGHT]  82.04,145.67 270 bottom
C292  2.2uF  [0402-TIGHT]  80.77,152.02 0 bottom
C293  0.1uF  [0402-TIGHT]  85.22,169.16 90 top
C294  0.1uF  [0402-TIGHT]  83.31,164.34 180 top
C295  0.1uF  [0402-TIGHT]  93.47,160.27 0 top
C296  0.1uF  [0402-TIGHT]  93.47,165.23 0 top
C297  0.1uF  [0402-TIGHT]  89.74,158.67 270 top
C298  0.1uF  [0402-TIGHT]  83.31,161.29 180 top
C299  0.1uF  [0402-TIGHT]  88.2,169.29 90 top
C300  0.1uF  [0402-TIGHT]  93.73,163.32 0 top
C301  10uF  [0402-TIGHT]  84.58,157.48 90 top
C302  10uF  [0402-TIGHT]  86.39,159.38 180 top
C303  0.1uF  [0402-TIGHT]  83.31,163.32 180 top
C304  0.1uF  [0402-TIGHT]  90.3,168.53 0 top
C305  2.2uF  [0402-TIGHT]  83.95,157.1 0 bottom
C306  0.1uF  [0402-TIGHT]  83.95,155.83 0 bottom
C307  2.2uF  [0402-TIGHT]  83.31,160.15 180 top
C308  0.1uF  [0402-TIGHT]  84.58,143.76 180 top
C309  10uF  [0402-TIGHT]  92.84,149.22 90 top
C310  2.2uF  [0402-TIGHT]  90.3,149.22 90 top
C311  0.1uF  [0402-TIGHT]  80.77,167.89 180 top
C312  0.1uF  [0402-TIGHT]  88.39,151.38 180 top
D1  Red  [LED-0603]  48.39,15.49 0 top
D2  Red  [LED-0603]  25.02,15.49 0 top
D3  Yellow  [LED-0603]  14.48,22.1 0 top
D4  Blue  [LED-0603]  13.21,48.77 270 top
D5  Yellow  [LED-0603]  37.85,22.1 0 top
D6  Blue  [LED-0603]  36.58,48.77 270 top
D7  Red  [LED-0603]  71.76,15.49 0 top
D8  Yellow  [LED-0603]  61.21,22.1 0 top
D9  Blue  [LED-0603]  59.94,48.77 270 top
D10  Red  [LED-0603]  95.12,15.49 0 top
D11  Yellow  [LED-0603]  84.58,22.1 0 top
D12  Blue  [LED-0603]  83.31,48.77 270 top
D13  Red  [LED-0603]  25.02,76.96 0 top
D14  Yellow  [LED-0603]  14.48,83.57 0 top
D15  Blue  [LED-0603]  13.21,110.24 270 top
D16  Red  [LED-0603]  48.39,76.96 0 top
D17  Yellow  [LED-0603]  37.85,83.57 0 top
D18  Blue  [LED-0603]  36.58,110.24 270 top
D19  Red  [LED-0603]  71.76,76.96 0 top
D20  Yellow  [LED-0603]  61.21,83.57 0 top
D21  Blue  [LED-0603]  59.94,110.24 270 top
D22  Red  [LED-0603]  95.12,76.96 0 top
D23  Yellow  [LED-0603]  84.58,83.57 0 top
D24  Blue  [LED-0603]  83.31,110.24 270 top
D25  Red  [LED-0603]  25.02,138.43 0 top
D26  Yellow  [LED-0603]  14.48,145.03 0 top
D27  Blue  [LED-0603]  13.21,171.7 270 top
D28  Red  [LED-0603]  48.39,138.43 0 top
D29  Yellow  [LED-0603]  37.85,145.03 0 top
D30  Blue  [LED-0603]  36.58,171.7 270 top
D31  Red  [LED-0603]  71.76,138.43 0 top
D32  Yellow  [LED-0603]  61.21,145.03 0 top
D33  Blue  [LED-0603]  59.94,171.7 270 top
D34  Red  [LED-0603]  95.12,138.43 0 top
D35  Yellow  [LED-0603]  84.58,145.03 0 top
D36  Blue  [LED-0603]  83.31,171.7 270 top
E$1  [FIDUCIAL-1X2]  4.23,190.63 0 top
E$2  [FIDUCIAL-1X2]  4.23,190.63 0 bottom
E$3  [FIDUCIAL-1X2]  102.45,190.63 0 top
E$4  [FIDUCIAL-1X2]  102.45,190.63 0 bottom
E$5  [FIDUCIAL-1.5X3]  4.23,15.75 0 top
E$6  [FIDUCIAL-1.5X3]  4.23,15.75 0 bottom
FB1  600Ω  [0805]  23.75,49.78 180 top
FB2  600Ω  [0805]  47.12,49.78 180 top
FB3  600Ω  [0805]  70.48,49.78 180 top
FB4  600Ω  [0805]  93.85,49.78 180 top
FB5  600Ω  [0805]  23.75,111.25 180 top
FB6  600Ω  [0805]  47.12,111.25 180 top
FB7  600Ω  [0805]  70.48,111.25 180 top
FB8  600Ω  [0805]  93.85,111.25 180 top
FB9  600Ω  [0805]  23.75,172.72 180 top
FB10  600Ω  [0805]  47.12,172.72 180 top
FB11  600Ω  [0805]  70.48,172.72 180 top
FB12  600Ω  [0805]  93.85,172.72 180 top
FD1  FIDUCIALUFIDUCIAL  [FIDUCIAL-MICRO]  29.08,63.37 0 top
FD2  FIDUCIALUFIDUCIAL  [FIDUCIAL-MICRO]  29.08,63.37 0 bottom
FD3  FIDUCIALUFIDUCIAL  [FIDUCIAL-MICRO]  12.57,10.03 0 top
FD4  FIDUCIALUFIDUCIAL  [FIDUCIAL-MICRO]  12.57,10.03 0 bottom
FD5  FIDUCIALUFIDUCIAL  [FIDUCIAL-MICRO]  52.45,63.37 0 top
FD6  FIDUCIALUFIDUCIAL  [FIDUCIAL-MICRO]  52.45,63.37 0 bottom
FD7  FIDUCIALUFIDUCIAL  [FIDUCIAL-MICRO]  35.94,10.03 0 top
FD8  FIDUCIALUFIDUCIAL  [FIDUCIAL-MICRO]  35.94,10.03 0 bottom
FD9  FIDUCIALUFIDUCIAL  [FIDUCIAL-MICRO]  75.82,63.37 0 top
FD10  FIDUCIALUFIDUCIAL  [FIDUCIAL-MICRO]  75.82,63.37 0 bottom
FD11  FIDUCIALUFIDUCIAL  [FIDUCIAL-MICRO]  59.31,10.03 0 top
FD12  FIDUCIALUFIDUCIAL  [FIDUCIAL-MICRO]  59.31,10.03 0 bottom
FD13  FIDUCIALUFIDUCIAL  [FIDUCIAL-MICRO]  99.19,63.37 0 top
FD14  FIDUCIALUFIDUCIAL  [FIDUCIAL-MICRO]  99.19,63.37 0 bottom
FD15  FIDUCIALUFIDUCIAL  [FIDUCIAL-MICRO]  82.68,10.03 0 top
FD16  FIDUCIALUFIDUCIAL  [FIDUCIAL-MICRO]  82.68,10.03 0 bottom
FD17  FIDUCIALUFIDUCIAL  [FIDUCIAL-MICRO]  29.08,124.84 0 top
FD18  FIDUCIALUFIDUCIAL  [FIDUCIAL-MICRO]  29.08,124.84 0 bottom
FD19  FIDUCIALUFIDUCIAL  [FIDUCIAL-MICRO]  12.57,71.5 0 top
FD20  FIDUCIALUFIDUCIAL  [FIDUCIAL-MICRO]  12.57,71.5 0 bottom
FD21  FIDUCIALUFIDUCIAL  [FIDUCIAL-MICRO]  52.45,124.84 0 top
FD22  FIDUCIALUFIDUCIAL  [FIDUCIAL-MICRO]  52.45,124.84 0 bottom
FD23  FIDUCIALUFIDUCIAL  [FIDUCIAL-MICRO]  35.94,71.5 0 top
FD24  FIDUCIALUFIDUCIAL  [FIDUCIAL-MICRO]  35.94,71.5 0 bottom
FD25  FIDUCIALUFIDUCIAL  [FIDUCIAL-MICRO]  75.82,124.84 0 top
FD26  FIDUCIALUFIDUCIAL  [FIDUCIAL-MICRO]  75.82,124.84 0 bottom
FD27  FIDUCIALUFIDUCIAL  [FIDUCIAL-MICRO]  59.31,71.5 0 top
FD28  FIDUCIALUFIDUCIAL  [FIDUCIAL-MICRO]  59.31,71.5 0 bottom
FD29  FIDUCIALUFIDUCIAL  [FIDUCIAL-MICRO]  99.19,124.84 0 top
FD30  FIDUCIALUFIDUCIAL  [FIDUCIAL-MICRO]  99.19,124.84 0 bottom
FD31  FIDUCIALUFIDUCIAL  [FIDUCIAL-MICRO]  82.68,71.5 0 top
FD32  FIDUCIALUFIDUCIAL  [FIDUCIAL-MICRO]  82.68,71.5 0 bottom
FD33  FIDUCIALUFIDUCIAL  [FIDUCIAL-MICRO]  29.08,186.31 0 top
FD34  FIDUCIALUFIDUCIAL  [FIDUCIAL-MICRO]  29.08,186.31 0 bottom
FD35  FIDUCIALUFIDUCIAL  [FIDUCIAL-MICRO]  12.57,132.97 0 top
FD36  FIDUCIALUFIDUCIAL  [FIDUCIAL-MICRO]  12.57,132.97 0 bottom
FD37  FIDUCIALUFIDUCIAL  [FIDUCIAL-MICRO]  52.45,186.31 0 top
FD38  FIDUCIALUFIDUCIAL  [FIDUCIAL-MICRO]  52.45,186.31 0 bottom
FD39  FIDUCIALUFIDUCIAL  [FIDUCIAL-MICRO]  35.94,132.97 0 top
FD40  FIDUCIALUFIDUCIAL  [FIDUCIAL-MICRO]  35.94,132.97 0 bottom
FD41  FIDUCIALUFIDUCIAL  [FIDUCIAL-MICRO]  75.82,186.31 0 top
FD42  FIDUCIALUFIDUCIAL  [FIDUCIAL-MICRO]  75.82,186.31 0 bottom
FD43  FIDUCIALUFIDUCIAL  [FIDUCIAL-MICRO]  59.31,132.97 0 top
FD44  FIDUCIALUFIDUCIAL  [FIDUCIAL-MICRO]  59.31,132.97 0 bottom
FD45  FIDUCIALUFIDUCIAL  [FIDUCIAL-MICRO]  99.19,186.31 0 top
FD46  FIDUCIALUFIDUCIAL  [FIDUCIAL-MICRO]  99.19,186.31 0 bottom
FD47  FIDUCIALUFIDUCIAL  [FIDUCIAL-MICRO]  82.68,132.97 0 top
FD48  FIDUCIALUFIDUCIAL  [FIDUCIAL-MICRO]  82.68,132.97 0 bottom
H1  STAND-OFF  [STAND-OFF]  27.18,11.94 0 top
H2  STAND-OFF  [STAND-OFF]  9.4,11.94 0 top
H3  STAND-OFF  [STAND-OFF]  9.4,65.28 0 top
H4  STAND-OFF  [STAND-OFF]  27.18,65.28 0 top
H5  STAND-OFF  [STAND-OFF]  50.55,11.94 0 top
H6  STAND-OFF  [STAND-OFF]  32.77,11.94 0 top
H7  STAND-OFF  [STAND-OFF]  32.77,65.28 0 top
H8  STAND-OFF  [STAND-OFF]  50.55,65.28 0 top
H9  STAND-OFF  [STAND-OFF]  73.91,11.94 0 top
H10  STAND-OFF  [STAND-OFF]  56.13,11.94 0 top
H11  STAND-OFF  [STAND-OFF]  56.13,65.28 0 top
H12  STAND-OFF  [STAND-OFF]  73.91,65.28 0 top
H13  STAND-OFF  [STAND-OFF]  97.28,11.94 0 top
H14  STAND-OFF  [STAND-OFF]  79.5,11.94 0 top
H15  STAND-OFF  [STAND-OFF]  79.5,65.28 0 top
H16  STAND-OFF  [STAND-OFF]  97.28,65.28 0 top
H17  STAND-OFF  [STAND-OFF]  27.18,73.41 0 top
H18  STAND-OFF  [STAND-OFF]  9.4,73.41 0 top
H19  STAND-OFF  [STAND-OFF]  9.4,126.75 0 top
H20  STAND-OFF  [STAND-OFF]  27.18,126.75 0 top
H21  STAND-OFF  [STAND-OFF]  50.55,73.41 0 top
H22  STAND-OFF  [STAND-OFF]  32.77,73.41 0 top
H23  STAND-OFF  [STAND-OFF]  32.77,126.75 0 top
H24  STAND-OFF  [STAND-OFF]  50.55,126.75 0 top
H25  STAND-OFF  [STAND-OFF]  73.91,73.41 0 top
H26  STAND-OFF  [STAND-OFF]  56.13,73.41 0 top
H27  STAND-OFF  [STAND-OFF]  56.13,126.75 0 top
H28  STAND-OFF  [STAND-OFF]  73.91,126.75 0 top
H29  STAND-OFF  [STAND-OFF]  97.28,73.41 0 top
H30  STAND-OFF  [STAND-OFF]  79.5,73.41 0 top
H31  STAND-OFF  [STAND-OFF]  79.5,126.75 0 top
H32  STAND-OFF  [STAND-OFF]  97.28,126.75 0 top
H33  STAND-OFF  [STAND-OFF]  27.18,134.87 0 top
H34  STAND-OFF  [STAND-OFF]  9.4,134.87 0 top
H35  STAND-OFF  [STAND-OFF]  9.4,188.21 0 top
H36  STAND-OFF  [STAND-OFF]  27.18,188.21 0 top
H37  STAND-OFF  [STAND-OFF]  50.55,134.87 0 top
H38  STAND-OFF  [STAND-OFF]  32.77,134.87 0 top
H39  STAND-OFF  [STAND-OFF]  32.77,188.21 0 top
H40  STAND-OFF  [STAND-OFF]  50.55,188.21 0 top
H41  STAND-OFF  [STAND-OFF]  73.91,134.87 0 top
H42  STAND-OFF  [STAND-OFF]  56.13,134.87 0 top
H43  STAND-OFF  [STAND-OFF]  56.13,188.21 0 top
H44  STAND-OFF  [STAND-OFF]  73.91,188.21 0 top
H45  STAND-OFF  [STAND-OFF]  97.28,134.87 0 top
H46  STAND-OFF  [STAND-OFF]  79.5,134.87 0 top
H47  STAND-OFF  [STAND-OFF]  79.5,188.21 0 top
H48  STAND-OFF  [STAND-OFF]  97.28,188.21 0 top
I2C  JUMPER-SMT_3_2-NC_TRACE_SILK  [SMT-JUMPER_3_2-NC_TRACE_SILK]  8.13,18.29 270 bottom
I2C1  JUMPER-SMT_3_2-NC_TRACE_SILK  [SMT-JUMPER_3_2-NC_TRACE_SILK]  31.5,18.29 270 bottom
I2C2  JUMPER-SMT_3_2-NC_TRACE_SILK  [SMT-JUMPER_3_2-NC_TRACE_SILK]  54.86,18.29 270 bottom
I2C3  JUMPER-SMT_3_2-NC_TRACE_SILK  [SMT-JUMPER_3_2-NC_TRACE_SILK]  78.23,18.29 270 bottom
I2C4  JUMPER-SMT_3_2-NC_TRACE_SILK  [SMT-JUMPER_3_2-NC_TRACE_SILK]  8.13,79.76 270 bottom
I2C5  JUMPER-SMT_3_2-NC_TRACE_SILK  [SMT-JUMPER_3_2-NC_TRACE_SILK]  31.5,79.76 270 bottom
I2C6  JUMPER-SMT_3_2-NC_TRACE_SILK  [SMT-JUMPER_3_2-NC_TRACE_SILK]  54.86,79.76 270 bottom
I2C7  JUMPER-SMT_3_2-NC_TRACE_SILK  [SMT-JUMPER_3_2-NC_TRACE_SILK]  78.23,79.76 270 bottom
I2C8  JUMPER-SMT_3_2-NC_TRACE_SILK  [SMT-JUMPER_3_2-NC_TRACE_SILK]  8.13,141.22 270 bottom
I2C9  JUMPER-SMT_3_2-NC_TRACE_SILK  [SMT-JUMPER_3_2-NC_TRACE_SILK]  31.5,141.22 270 bottom
I2C10  JUMPER-SMT_3_2-NC_TRACE_SILK  [SMT-JUMPER_3_2-NC_TRACE_SILK]  54.86,141.22 270 bottom
I2C11  JUMPER-SMT_3_2-NC_TRACE_SILK  [SMT-JUMPER_3_2-NC_TRACE_SILK]  78.23,141.22 270 bottom
J1  THING_PLUS_LOGICAL  [THING_PLUS]  6.86,9.4 0 top
J2  [JST-2-SMD]  10.67,27.18 90 top
J3  QWIIC_RIGHT_ANGLE  [JST04_1MM_RA]  11.94,18.29 270 top
J4  [USB-C-16P_4LAYER-PADS]  18.29,15.75 0 top
J5  [1X03_NO_SILK]  20.83,48.77 180 top
J6  MICRO-SD-ATOM  [MICROSD_ATOM]  18.92,20.57 0 bottom
J7  THING_PLUS_LOGICAL  [THING_PLUS]  30.23,9.4 0 top
J8  [JST-2-SMD]  34.04,27.18 90 top
J9  QWIIC_RIGHT_ANGLE  [JST04_1MM_RA]  35.31,18.29 270 top
J10  [USB-C-16P_4LAYER-PADS]  41.66,15.75 0 top
J11  [1X03_NO_SILK]  44.2,48.77 180 top
J12  MICRO-SD-ATOM  [MICROSD_ATOM]  42.29,20.57 0 bottom
J13  THING_PLUS_LOGICAL  [THING_PLUS]  53.59,9.4 0 top
J14  [JST-2-SMD]  57.4,27.18 90 top
J15  QWIIC_RIGHT_ANGLE  [JST04_1MM_RA]  58.67,18.29 270 top
J16  [USB-C-16P_4LAYER-PADS]  65.02,15.75 0 top
J17  [1X03_NO_SILK]  67.56,48.77 180 top
J18  MICRO-SD-ATOM  [MICROSD_ATOM]  65.66,20.57 0 bottom
J19  THING_PLUS_LOGICAL  [THING_PLUS]  76.96,9.4 0 top
J20  [JST-2-SMD]  80.77,27.18 90 top
J21  QWIIC_RIGHT_ANGLE  [JST04_1MM_RA]  82.04,18.29 270 top
J22  [USB-C-16P_4LAYER-PADS]  88.39,15.75 0 top
J23  [1X03_NO_SILK]  90.93,48.77 180 top
J24  MICRO-SD-ATOM  [MICROSD_ATOM]  89.03,20.57 0 bottom
J25  THING_PLUS_LOGICAL  [THING_PLUS]  6.86,70.87 0 top
J26  [JST-2-SMD]  10.67,88.65 90 top
J27  QWIIC_RIGHT_ANGLE  [JST04_1MM_RA]  11.94,79.76 270 top
J28  [USB-C-16P_4LAYER-PADS]  18.29,77.22 0 top
J29  [1X03_NO_SILK]  20.83,110.24 180 top
J30  MICRO-SD-ATOM  [MICROSD_ATOM]  18.92,82.04 0 bottom
J31  THING_PLUS_LOGICAL  [THING_PLUS]  30.23,70.87 0 top
J32  [JST-2-SMD]  34.04,88.65 90 top
J33  QWIIC_RIGHT_ANGLE  [JST04_1MM_RA]  35.31,79.76 270 top
J34  [USB-C-16P_4LAYER-PADS]  41.66,77.22 0 top
J35  [1X03_NO_SILK]  44.2,110.24 180 top
J36  MICRO-SD-ATOM  [MICROSD_ATOM]  42.29,82.04 0 bottom
J37  THING_PLUS_LOGICAL  [THING_PLUS]  53.59,70.87 0 top
J38  [JST-2-SMD]  57.4,88.65 90 top
J39  QWIIC_RIGHT_ANGLE  [JST04_1MM_RA]  58.67,79.76 270 top
J40  [USB-C-16P_4LAYER-PADS]  65.02,77.22 0 top
J41  [1X03_NO_SILK]  67.56,110.24 180 top
J42  MICRO-SD-ATOM  [MICROSD_ATOM]  65.66,82.04 0 bottom
J43  THING_PLUS_LOGICAL  [THING_PLUS]  76.96,70.87 0 top
J44  [JST-2-SMD]  80.77,88.65 90 top
J45  QWIIC_RIGHT_ANGLE  [JST04_1MM_RA]  82.04,79.76 270 top
J46  [USB-C-16P_4LAYER-PADS]  88.39,77.22 0 top
J47  [1X03_NO_SILK]  90.93,110.24 180 top
J48  MICRO-SD-ATOM  [MICROSD_ATOM]  89.03,82.04 0 bottom
J49  THING_PLUS_LOGICAL  [THING_PLUS]  6.86,132.33 0 top
J50  [JST-2-SMD]  10.67,150.11 90 top
J51  QWIIC_RIGHT_ANGLE  [JST04_1MM_RA]  11.94,141.22 270 top
J52  [USB-C-16P_4LAYER-PADS]  18.29,138.68 0 top
J53  [1X03_NO_SILK]  20.83,171.7 180 top
J54  MICRO-SD-ATOM  [MICROSD_ATOM]  18.92,143.51 0 bottom
J55  THING_PLUS_LOGICAL  [THING_PLUS]  30.23,132.33 0 top
J56  [JST-2-SMD]  34.04,150.11 90 top
J57  QWIIC_RIGHT_ANGLE  [JST04_1MM_RA]  35.31,141.22 270 top
J58  [USB-C-16P_4LAYER-PADS]  41.66,138.68 0 top
J59  [1X03_NO_SILK]  44.2,171.7 180 top
J60  MICRO-SD-ATOM  [MICROSD_ATOM]  42.29,143.51 0 bottom
J61  THING_PLUS_LOGICAL  [THING_PLUS]  53.59,132.33 0 top
J62  [JST-2-SMD]  57.4,150.11 90 top
J63  QWIIC_RIGHT_ANGLE  [JST04_1MM_RA]  58.67,141.22 270 top
J64  [USB-C-16P_4LAYER-PADS]  65.02,138.68 0 top
J65  [1X03_NO_SILK]  67.56,171.7 180 top
J66  MICRO-SD-ATOM  [MICROSD_ATOM]  65.66,143.51 0 bottom
J67  THING_PLUS_LOGICAL  [THING_PLUS]  76.96,132.33 0 top
J68  [JST-2-SMD]  80.77,150.11 90 top
J69  QWIIC_RIGHT_ANGLE  [JST04_1MM_RA]  82.04,141.22 270 top
J70  [USB-C-16P_4LAYER-PADS]  88.39,138.68 0 top
J71  [1X03_NO_SILK]  90.93,171.7 180 top
J72  MICRO-SD-ATOM  [MICROSD_ATOM]  89.03,143.51 0 bottom
L1  4.7μH  [1008(2520)]  16,34.54 90 top
L2  4.7μH  [1008(2520)]  39.37,34.54 90 top
L3  4.7μH  [1008(2520)]  62.74,34.54 90 top
L4  4.7μH  [1008(2520)]  86.11,34.54 90 top
L5  4.7μH  [1008(2520)]  16,96.01 90 top
L6  4.7μH  [1008(2520)]  39.37,96.01 90 top
L7  4.7μH  [1008(2520)]  62.74,96.01 90 top
L8  4.7μH  [1008(2520)]  86.11,96.01 90 top
L9  4.7μH  [1008(2520)]  16,157.48 90 top
L10  4.7μH  [1008(2520)]  39.37,157.48 90 top
L11  4.7μH  [1008(2520)]  62.74,157.48 90 top
L12  4.7μH  [1008(2520)]  86.11,157.48 90 top
LOGO1  SFE_LOGO_NAME_FLAME.1_INCH  [SFE_LOGO_NAME_FLAME_.1]  18.29,63.75 0 bottom
LOGO2  OSHW-LOGOS  [OSHW-LOGO-S]  18.29,56.39 0 bottom
LOGO3  QWIIC_LOGO_4MM  [QWIIC_4MM]  11.37,14.73 0 top
LOGO4  SFE_LOGO_NAME_FLAME.1_INCH  [SFE_LOGO_NAME_FLAME_.1]  41.66,63.75 0 bottom
LOGO5  OSHW-LOGOS  [OSHW-LOGO-S]  41.66,56.39 0 bottom
LOGO6  QWIIC_LOGO_4MM  [QWIIC_4MM]  34.73,14.73 0 top
LOGO7  SFE_LOGO_NAME_FLAME.1_INCH  [SFE_LOGO_NAME_FLAME_.1]  65.02,63.75 0 bottom
LOGO8  OSHW-LOGOS  [OSHW-LOGO-S]  65.02,56.39 0 bottom
LOGO9  QWIIC_LOGO_4MM  [QWIIC_4MM]  58.1,14.73 0 top
LOGO10  SFE_LOGO_NAME_FLAME.1_INCH  [SFE_LOGO_NAME_FLAME_.1]  88.39,63.75 0 bottom
LOGO11  OSHW-LOGOS  [OSHW-LOGO-S]  88.39,56.39 0 bottom
LOGO12  QWIIC_LOGO_4MM  [QWIIC_4MM]  81.47,14.73 0 top
LOGO13  SFE_LOGO_NAME_FLAME.1_INCH  [SFE_LOGO_NAME_FLAME_.1]  18.29,125.22 0 bottom
LOGO14  OSHW-LOGOS  [OSHW-LOGO-S]  18.29,117.86 0 bottom
LOGO15  QWIIC_LOGO_4MM  [QWIIC_4MM]  11.37,76.2 0 top
LOGO16  SFE_LOGO_NAME_FLAME.1_INCH  [SFE_LOGO_NAME_FLAME_.1]  41.66,125.22 0 bottom
LOGO17  OSHW-LOGOS  [OSHW-LOGO-S]  41.66,117.86 0 bottom
LOGO18  QWIIC_LOGO_4MM  [QWIIC_4MM]  34.73,76.2 0 top
LOGO19  SFE_LOGO_NAME_FLAME.1_INCH  [SFE_LOGO_NAME_FLAME_.1]  65.02,125.22 0 bottom
LOGO20  OSHW-LOGOS  [OSHW-LOGO-S]  65.02,117.86 0 bottom
LOGO21  QWIIC_LOGO_4MM  [QWIIC_4MM]  58.1,76.2 0 top
LOGO22  SFE_LOGO_NAME_FLAME.1_INCH  [SFE_LOGO_NAME_FLAME_.1]  88.39,125.22 0 bottom
LOGO23  OSHW-LOGOS  [OSHW-LOGO-S]  88.39,117.86 0 bottom
LOGO24  QWIIC_LOGO_4MM  [QWIIC_4MM]  81.47,76.2 0 top
LOGO25  SFE_LOGO_NAME_FLAME.1_INCH  [SFE_LOGO_NAME_FLAME_.1]  18.29,186.69 0 bottom
LOGO26  OSHW-LOGOS  [OSHW-LOGO-S]  18.29,179.32 0 bottom
LOGO27  QWIIC_LOGO_4MM  [QWIIC_4MM]  11.37,137.67 0 top
LOGO28  SFE_LOGO_NAME_FLAME.1_INCH  [SFE_LOGO_NAME_FLAME_.1]  41.66,186.69 0 bottom
LOGO29  OSHW-LOGOS  [OSHW-LOGO-S]  41.66,179.32 0 bottom
LOGO30  QWIIC_LOGO_4MM  [QWIIC_4MM]  34.73,137.67 0 top
LOGO31  SFE_LOGO_NAME_FLAME.1_INCH  [SFE_LOGO_NAME_FLAME_.1]  65.02,186.69 0 bottom
LOGO32  OSHW-LOGOS  [OSHW-LOGO-S]  65.02,179.32 0 bottom
LOGO33  QWIIC_LOGO_4MM  [QWIIC_4MM]  58.1,137.67 0 top
LOGO34  SFE_LOGO_NAME_FLAME.1_INCH  [SFE_LOGO_NAME_FLAME_.1]  88.39,186.69 0 bottom
LOGO35  OSHW-LOGOS  [OSHW-LOGO-S]  88.39,179.32 0 bottom
LOGO36  QWIIC_LOGO_4MM  [QWIIC_4MM]  81.47,137.67 0 top
LP  JUMPER-SMT_2_NC_TRACE_SILK  [SMT-JUMPER_2_NC_TRACE_SILK]  23.37,30.99 90 bottom
LP1  JUMPER-SMT_2_NC_TRACE_SILK  [SMT-JUMPER_2_NC_TRACE_SILK]  46.74,30.99 90 bottom
LP2  JUMPER-SMT_2_NC_TRACE_SILK  [SMT-JUMPER_2_NC_TRACE_SILK]  70.1,30.99 90 bottom
LP3  JUMPER-SMT_2_NC_TRACE_SILK  [SMT-JUMPER_2_NC_TRACE_SILK]  93.47,30.99 90 bottom
LP4  JUMPER-SMT_2_NC_TRACE_SILK  [SMT-JUMPER_2_NC_TRACE_SILK]  23.37,92.46 90 bottom
LP5  JUMPER-SMT_2_NC_TRACE_SILK  [SMT-JUMPER_2_NC_TRACE_SILK]  46.74,92.46 90 bottom
LP6  JUMPER-SMT_2_NC_TRACE_SILK  [SMT-JUMPER_2_NC_TRACE_SILK]  70.1,92.46 90 bottom
LP7  JUMPER-SMT_2_NC_TRACE_SILK  [SMT-JUMPER_2_NC_TRACE_SILK]  93.47,92.46 90 bottom
LP8  JUMPER-SMT_2_NC_TRACE_SILK  [SMT-JUMPER_2_NC_TRACE_SILK]  23.37,153.92 90 bottom
LP9  JUMPER-SMT_2_NC_TRACE_SILK  [SMT-JUMPER_2_NC_TRACE_SILK]  46.74,153.92 90 bottom
LP10  JUMPER-SMT_2_NC_TRACE_SILK  [SMT-JUMPER_2_NC_TRACE_SILK]  70.1,153.92 90 bottom
LP11  JUMPER-SMT_2_NC_TRACE_SILK  [SMT-JUMPER_2_NC_TRACE_SILK]  93.47,153.92 90 bottom
PWR  JUMPER-SMT_2_NC_TRACE_SILK  [SMT-JUMPER_2_NC_TRACE_SILK]  28.45,15.75 270 bottom
PWR1  JUMPER-SMT_2_NC_TRACE_SILK  [SMT-JUMPER_2_NC_TRACE_SILK]  51.82,15.75 270 bottom
PWR2  JUMPER-SMT_2_NC_TRACE_SILK  [SMT-JUMPER_2_NC_TRACE_SILK]  75.18,15.75 270 bottom
PWR3  JUMPER-SMT_2_NC_TRACE_SILK  [SMT-JUMPER_2_NC_TRACE_SILK]  98.55,15.75 270 bottom
PWR4  JUMPER-SMT_2_NC_TRACE_SILK  [SMT-JUMPER_2_NC_TRACE_SILK]  28.45,77.22 270 bottom
PWR5  JUMPER-SMT_2_NC_TRACE_SILK  [SMT-JUMPER_2_NC_TRACE_SILK]  51.82,77.22 270 bottom
PWR6  JUMPER-SMT_2_NC_TRACE_SILK  [SMT-JUMPER_2_NC_TRACE_SILK]  75.18,77.22 270 bottom
PWR7  JUMPER-SMT_2_NC_TRACE_SILK  [SMT-JUMPER_2_NC_TRACE_SILK]  98.55,77.22 270 bottom
PWR8  JUMPER-SMT_2_NC_TRACE_SILK  [SMT-JUMPER_2_NC_TRACE_SILK]  28.45,138.68 270 bottom
PWR9  JUMPER-SMT_2_NC_TRACE_SILK  [SMT-JUMPER_2_NC_TRACE_SILK]  51.82,138.68 270 bottom
PWR10  JUMPER-SMT_2_NC_TRACE_SILK  [SMT-JUMPER_2_NC_TRACE_SILK]  75.18,138.68 270 bottom
PWR11  JUMPER-SMT_2_NC_TRACE_SILK  [SMT-JUMPER_2_NC_TRACE_SILK]  98.55,138.68 270 bottom
Q1  100mA/20V/3.8Ω  [SOT-416FL]  22.1,56.39 180 bottom
Q2  100mA/20V/3.8Ω  [SOT-416FL]  45.47,56.39 180 bottom
Q3  100mA/20V/3.8Ω  [SOT-416FL]  68.83,56.39 180 bottom
Q4  100mA/20V/3.8Ω  [SOT-416FL]  92.2,56.39 180 bottom
Q5  100mA/20V/3.8Ω  [SOT-416FL]  22.1,117.86 180 bottom
Q6  100mA/20V/3.8Ω  [SOT-416FL]  45.47,117.86 180 bottom
Q7  100mA/20V/3.8Ω  [SOT-416FL]  68.83,117.86 180 bottom
Q8  100mA/20V/3.8Ω  [SOT-416FL]  92.2,117.86 180 bottom
Q9  100mA/20V/3.8Ω  [SOT-416FL]  22.1,179.32 180 bottom
Q10  100mA/20V/3.8Ω  [SOT-416FL]  45.47,179.32 180 bottom
Q11  100mA/20V/3.8Ω  [SOT-416FL]  68.83,179.32 180 bottom
Q12  100mA/20V/3.8Ω  [SOT-416FL]  92.2,179.32 180 bottom
R1  470  [0402-TIGHT]  10.67,50.03 270 top
R2  10k  [0402-TIGHT]  11.94,50.03 270 top
R3  5.1k  [0402-TIGHT]  20.19,17.26 270 top
R4  5.1k  [0402-TIGHT]  16.38,17.26 270 top
R5  2.2k  [0402-TIGHT]  10.03,17.03 90 bottom
R6  2.2k  [0402-TIGHT]  10.03,19.55 270 bottom
R7  1M  [0402-TIGHT]  16.38,25.92 90 bottom
R8  10k  [0402-TIGHT]  13.85,27.81 180 bottom
R9  1k  [0402-TIGHT]  20.18,46.86 180 top
R10  27OHM  [0402-TIGHT]  18.8,23.75 90 top
R11  27OHM  [0402-TIGHT]  17.78,23.75 90 top
R12  10k  [0402-TIGHT]  25.9,24.64 180 top
R13  10k  [0402-TIGHT]  22.11,34.8 0 top
R14  1k  [0402-TIGHT]  22.11,34.8 180 bottom
R15  4.7k  [0402-TIGHT]  27.81,15.49 180 top
R16  2.2k  [0402-TIGHT]  10.67,22.73 90 bottom
R17  4.7k  [0402-TIGHT]  9.4,22.73 90 bottom
R18  10Ω  [0402-TIGHT]  13.21,36.07 180 top
R19  2.2k  [0402-TIGHT]  11.3,47.5 0 top
R20  10k  [0402-TIGHT]  22.1,54.48 90 bottom
R21  10k  [0402-TIGHT]  22.73,28.45 90 top
R22  1M  [0402-TIGHT]  24,28.45 270 top
R23  10k  [0402-TIGHT]  18.67,34.8 180 bottom
R24  470  [0402-TIGHT]  34.04,50.03 270 top
R25  10k  [0402-TIGHT]  35.31,50.03 270 top
R26  5.1k  [0402-TIGHT]  43.56,17.26 270 top
R27  5.1k  [0402-TIGHT]  39.75,17.26 270 top
R28  2.2k  [0402-TIGHT]  33.4,17.03 90 bottom
R29  2.2k  [0402-TIGHT]  33.4,19.55 270 bottom
R30  1M  [0402-TIGHT]  39.75,25.92 90 bottom
R31  10k  [0402-TIGHT]  37.22,27.81 180 bottom
R32  1k  [0402-TIGHT]  43.55,46.86 180 top
R33  10k  [0402-TIGHT]  49.27,24.64 180 top
R34  10k  [0402-TIGHT]  45.47,34.8 0 top
R35  1k  [0402-TIGHT]  45.47,34.8 180 bottom
R36  4.7k  [0402-TIGHT]  51.18,15.49 180 top
R37  2.2k  [0402-TIGHT]  34.04,22.73 90 bottom
R38  4.7k  [0402-TIGHT]  32.77,22.73 90 bottom
R39  10Ω  [0402-TIGHT]  36.58,36.07 180 top
R40  27OHM  [0402-TIGHT]  42.16,23.75 90 top
R41  27OHM  [0402-TIGHT]  41.15,23.75 90 top
R42  2.2k  [0402-TIGHT]  34.67,47.5 0 top
R43  10k  [0402-TIGHT]  45.47,54.48 90 bottom
R44  10k  [0402-TIGHT]  46.1,28.45 90 top
R45  1M  [0402-TIGHT]  47.37,28.45 270 top
R46  10k  [0402-TIGHT]  42.04,34.8 180 bottom
R47  470  [0402-TIGHT]  57.4,50.03 270 top
R48  10k  [0402-TIGHT]  58.67,50.03 270 top
R49  5.1k  [0402-TIGHT]  66.93,17.26 270 top
R50  5.1k  [0402-TIGHT]  63.12,17.26 270 top
R51  2.2k  [0402-TIGHT]  56.77,17.03 90 bottom
R52  2.2k  [0402-TIGHT]  56.77,19.55 270 bottom
R53  1M  [0402-TIGHT]  63.12,25.92 90 bottom
R54  10k  [0402-TIGHT]  60.59,27.81 180 bottom
R55  1k  [0402-TIGHT]  66.92,46.86 180 top
R56  10k  [0402-TIGHT]  72.64,24.64 180 top
R57  10k  [0402-TIGHT]  68.84,34.8 0 top
R58  1k  [0402-TIGHT]  68.84,34.8 180 bottom
R59  4.7k  [0402-TIGHT]  74.55,15.49 180 top
R60  2.2k  [0402-TIGHT]  57.4,22.73 90 bottom
R61  4.7k  [0402-TIGHT]  56.13,22.73 90 bottom
R62  10Ω  [0402-TIGHT]  59.94,36.07 180 top
R63  27OHM  [0402-TIGHT]  65.53,23.75 90 top
R64  27OHM  [0402-TIGHT]  64.52,23.75 90 top
R65  2.2k  [0402-TIGHT]  58.04,47.5 0 top
R66  10k  [0402-TIGHT]  68.83,54.48 90 bottom
R67  10k  [0402-TIGHT]  69.47,28.45 90 top
R68  1M  [0402-TIGHT]  70.74,28.45 270 top
R69  10k  [0402-TIGHT]  65.41,34.8 180 bottom
R70  470  [0402-TIGHT]  80.77,50.03 270 top
R71  10k  [0402-TIGHT]  82.04,50.03 270 top
R72  5.1k  [0402-TIGHT]  90.3,17.26 270 top
R73  5.1k  [0402-TIGHT]  86.49,17.26 270 top
R74  2.2k  [0402-TIGHT]  80.14,17.03 90 bottom
R75  2.2k  [0402-TIGHT]  80.14,19.55 270 bottom
R76  1M  [0402-TIGHT]  86.49,25.92 90 bottom
R77  10k  [0402-TIGHT]  83.95,27.81 180 bottom
R78  1k  [0402-TIGHT]  90.29,46.86 180 top
R79  10k  [0402-TIGHT]  96,24.64 180 top
R80  10k  [0402-TIGHT]  92.21,34.8 0 top
R81  1k  [0402-TIGHT]  92.21,34.8 180 bottom
R82  4.7k  [0402-TIGHT]  97.92,15.49 180 top
R83  2.2k  [0402-TIGHT]  80.77,22.73 90 bottom
R84  4.7k  [0402-TIGHT]  79.5,22.73 90 bottom
R85  10Ω  [0402-TIGHT]  83.31,36.07 180 top
R86  27OHM  [0402-TIGHT]  88.9,23.75 90 top
R87  27OHM  [0402-TIGHT]  87.88,23.75 90 top
R88  2.2k  [0402-TIGHT]  81.41,47.5 0 top
R89  10k  [0402-TIGHT]  92.2,54.48 90 bottom
R90  10k  [0402-TIGHT]  92.84,28.45 90 top
R91  1M  [0402-TIGHT]  94.11,28.45 270 top
R92  10k  [0402-TIGHT]  88.77,34.8 180 bottom
R93  470  [0402-TIGHT]  10.67,111.5 270 top
R94  10k  [0402-TIGHT]  11.94,111.5 270 top
R95  5.1k  [0402-TIGHT]  20.19,78.73 270 top
R96  5.1k  [0402-TIGHT]  16.38,78.73 270 top
R97  2.2k  [0402-TIGHT]  10.03,78.49 90 bottom
R98  2.2k  [0402-TIGHT]  10.03,81.02 270 bottom
R99  1M  [0402-TIGHT]  16.38,87.38 90 bottom
R100  10k  [0402-TIGHT]  13.85,89.28 180 bottom
R101  1k  [0402-TIGHT]  20.18,108.33 180 top
R102  10k  [0402-TIGHT]  25.9,86.11 180 top
R103  10k  [0402-TIGHT]  22.11,96.27 0 top
R104  1k  [0402-TIGHT]  22.11,96.27 180 bottom
R105  4.7k  [0402-TIGHT]  27.81,76.96 180 top
R106  2.2k  [0402-TIGHT]  10.67,84.2 90 bottom
R107  4.7k  [0402-TIGHT]  9.4,84.2 90 bottom
R108  10Ω  [0402-TIGHT]  13.21,97.54 180 top
R109  27OHM  [0402-TIGHT]  18.8,85.22 90 top
R110  27OHM  [0402-TIGHT]  17.78,85.22 90 top
R111  2.2k  [0402-TIGHT]  11.3,108.97 0 top
R112  10k  [0402-TIGHT]  22.1,115.95 90 bottom
R113  10k  [0402-TIGHT]  22.73,89.92 90 top
R114  1M  [0402-TIGHT]  24,89.92 270 top
R115  10k  [0402-TIGHT]  18.67,96.27 180 bottom
R116  470  [0402-TIGHT]  34.04,111.5 270 top
R117  10k  [0402-TIGHT]  35.31,111.5 270 top
R118  5.1k  [0402-TIGHT]  43.56,78.73 270 top
R119  5.1k  [0402-TIGHT]  39.75,78.73 270 top
R120  2.2k  [0402-TIGHT]  33.4,78.49 90 bottom
R121  2.2k  [0402-TIGHT]  33.4,81.02 270 bottom
R122  1M  [0402-TIGHT]  39.75,87.38 90 bottom
R123  10k  [0402-TIGHT]  37.22,89.28 180 bottom
R124  1k  [0402-TIGHT]  43.55,108.33 180 top
R125  10k  [0402-TIGHT]  49.27,86.11 180 top
R126  10k  [0402-TIGHT]  45.47,96.27 0 top
R127  1k  [0402-TIGHT]  45.47,96.27 180 bottom
R128  4.7k  [0402-TIGHT]  51.18,76.96 180 top
R129  2.2k  [0402-TIGHT]  34.04,84.2 90 bottom
R130  4.7k  [0402-TIGHT]  32.77,84.2 90 bottom
R131  10Ω  [0402-TIGHT]  36.58,97.54 180 top
R132  27OHM  [0402-TIGHT]  42.16,85.22 90 top
R133  27OHM  [0402-TIGHT]  41.15,85.22 90 top
R134  2.2k  [0402-TIGHT]  34.67,108.97 0 top
R135  10k  [0402-TIGHT]  45.47,115.95 90 bottom
R136  10k  [0402-TIGHT]  46.1,89.92 90 top
R137  1M  [0402-TIGHT]  47.37,89.92 270 top
R138  10k  [0402-TIGHT]  42.04,96.27 180 bottom
R139  470  [0402-TIGHT]  57.4,111.5 270 top
R140  10k  [0402-TIGHT]  58.67,111.5 270 top
R141  5.1k  [0402-TIGHT]  66.93,78.73 270 top
R142  5.1k  [0402-TIGHT]  63.12,78.73 270 top
R143  2.2k  [0402-TIGHT]  56.77,78.49 90 bottom
R144  2.2k  [0402-TIGHT]  56.77,81.02 270 bottom
R145  1M  [0402-TIGHT]  63.12,87.38 90 bottom
R146  10k  [0402-TIGHT]  60.59,89.28 180 bottom
R147  1k  [0402-TIGHT]  66.92,108.33 180 top
R148  10k  [0402-TIGHT]  72.64,86.11 180 top
R149  10k  [0402-TIGHT]  68.84,96.27 0 top
R150  1k  [0402-TIGHT]  68.84,96.27 180 bottom
R151  4.7k  [0402-TIGHT]  74.55,76.96 180 top
R152  2.2k  [0402-TIGHT]  57.4,84.2 90 bottom
R153  4.7k  [0402-TIGHT]  56.13,84.2 90 bottom
R154  10Ω  [0402-TIGHT]  59.94,97.54 180 top
R155  27OHM  [0402-TIGHT]  65.53,85.22 90 top
R156  27OHM  [0402-TIGHT]  64.52,85.22 90 top
R157  2.2k  [0402-TIGHT]  58.04,108.97 0 top
R158  10k  [0402-TIGHT]  68.83,115.95 90 bottom
R159  10k  [0402-TIGHT]  69.47,89.92 90 top
R160  1M  [0402-TIGHT]  70.74,89.92 270 top
R161  10k  [0402-TIGHT]  65.41,96.27 180 bottom
R162  470  [0402-TIGHT]  80.77,111.5 270 top
R163  10k  [0402-TIGHT]  82.04,111.5 270 top
R164  5.1k  [0402-TIGHT]  90.3,78.73 270 top
R165  5.1k  [0402-TIGHT]  86.49,78.73 270 top
R166  2.2k  [0402-TIGHT]  80.14,78.49 90 bottom
R167  2.2k  [0402-TIGHT]  80.14,81.02 270 bottom
R168  1M  [0402-TIGHT]  86.49,87.38 90 bottom
R169  10k  [0402-TIGHT]  83.95,89.28 180 bottom
R170  1k  [0402-TIGHT]  90.29,108.33 180 top
R171  10k  [0402-TIGHT]  96,86.11 180 top
R172  10k  [0402-TIGHT]  92.21,96.27 0 top
R173  1k  [0402-TIGHT]  92.21,96.27 180 bottom
R174  4.7k  [0402-TIGHT]  97.92,76.96 180 top
R175  2.2k  [0402-TIGHT]  80.77,84.2 90 bottom
R176  4.7k  [0402-TIGHT]  79.5,84.2 90 bottom
R177  10Ω  [0402-TIGHT]  83.31,97.54 180 top
R178  27OHM  [0402-TIGHT]  88.9,85.22 90 top
R179  27OHM  [0402-TIGHT]  87.88,85.22 90 top
R180  2.2k  [0402-TIGHT]  81.41,108.97 0 top
R181  10k  [0402-TIGHT]  92.2,115.95 90 bottom
R182  10k  [0402-TIGHT]  92.84,89.92 90 top
R183  1M  [0402-TIGHT]  94.11,89.92 270 top
R184  10k  [0402-TIGHT]  88.77,96.27 180 bottom
R185  470  [0402-TIGHT]  10.67,172.97 270 top
R186  10k  [0402-TIGHT]  11.94,172.97 270 top
R187  5.1k  [0402-TIGHT]  20.19,140.2 270 top
R188  5.1k  [0402-TIGHT]  16.38,140.2 270 top
R189  2.2k  [0402-TIGHT]  10.03,139.96 90 bottom
R190  2.2k  [0402-TIGHT]  10.03,142.49 270 bottom
R191  1M  [0402-TIGHT]  16.38,148.85 90 bottom
R192  10k  [0402-TIGHT]  13.85,150.75 180 bottom
R193  1k  [0402-TIGHT]  20.18,169.8 180 top
R194  10k  [0402-TIGHT]  25.9,147.57 180 top
R195  10k  [0402-TIGHT]  22.11,157.73 0 top
R196  1k  [0402-TIGHT]  22.11,157.73 180 bottom
R197  4.7k  [0402-TIGHT]  27.81,138.43 180 top
R198  2.2k  [0402-TIGHT]  10.67,145.67 90 bottom
R199  4.7k  [0402-TIGHT]  9.4,145.67 90 bottom
R200  10Ω  [0402-TIGHT]  13.21,159 180 top
R201  27OHM  [0402-TIGHT]  18.8,146.69 90 top
R202  27OHM  [0402-TIGHT]  17.78,146.69 90 top
R203  2.2k  [0402-TIGHT]  11.3,170.43 0 top
R204  10k  [0402-TIGHT]  22.1,177.42 90 bottom
R205  10k  [0402-TIGHT]  22.73,151.38 90 top
R206  1M  [0402-TIGHT]  24,151.38 270 top
R207  10k  [0402-TIGHT]  18.67,157.73 180 bottom
R208  470  [0402-TIGHT]  34.04,172.97 270 top
R209  10k  [0402-TIGHT]  35.31,172.97 270 top
R210  5.1k  [0402-TIGHT]  43.56,140.2 270 top
R211  5.1k  [0402-TIGHT]  39.75,140.2 270 top
R212  2.2k  [0402-TIGHT]  33.4,139.96 90 bottom
R213  2.2k  [0402-TIGHT]  33.4,142.49 270 bottom
R214  1M  [0402-TIGHT]  39.75,148.85 90 bottom
R215  10k  [0402-TIGHT]  37.22,150.75 180 bottom
R216  1k  [0402-TIGHT]  43.55,169.8 180 top
R217  10k  [0402-TIGHT]  49.27,147.57 180 top
R218  10k  [0402-TIGHT]  45.47,157.73 0 top
R219  1k  [0402-TIGHT]  45.47,157.73 180 bottom
R220  4.7k  [0402-TIGHT]  51.18,138.43 180 top
R221  2.2k  [0402-TIGHT]  34.04,145.67 90 bottom
R222  4.7k  [0402-TIGHT]  32.77,145.67 90 bottom
R223  10Ω  [0402-TIGHT]  36.58,159 180 top
R224  27OHM  [0402-TIGHT]  42.16,146.69 90 top
R225  27OHM  [0402-TIGHT]  41.15,146.69 90 top
R226  2.2k  [0402-TIGHT]  34.67,170.43 0 top
R227  10k  [0402-TIGHT]  45.47,177.42 90 bottom
R228  10k  [0402-TIGHT]  46.1,151.38 90 top
R229  1M  [0402-TIGHT]  47.37,151.38 270 top
R230  10k  [0402-TIGHT]  42.04,157.73 180 bottom
R231  470  [0402-TIGHT]  57.4,172.97 270 top
R232  10k  [0402-TIGHT]  58.67,172.97 270 top
R233  5.1k  [0402-TIGHT]  66.93,140.2 270 top
R234  5.1k  [0402-TIGHT]  63.12,140.2 270 top
R235  2.2k  [0402-TIGHT]  56.77,139.96 90 bottom
R236  2.2k  [0402-TIGHT]  56.77,142.49 270 bottom
R237  1M  [0402-TIGHT]  63.12,148.85 90 bottom
R238  10k  [0402-TIGHT]  60.59,150.75 180 bottom
R239  1k  [0402-TIGHT]  66.92,169.8 180 top